# Altium PCB PCB2.PcbDoc
Units mm, origin at the board's own origin, x right, y up, seen from the top; angles counter-clockwise.
Board outline 100 x 100 mm, 6 copper layers (Top Layer, GND-A, VCC, GND-D, VEE, Bottom Layer), stack 1.231 mm thick; 147 components, 79 nets, 413 pads, 76 vias.
Unrouted connection lines stored in the file: 2.
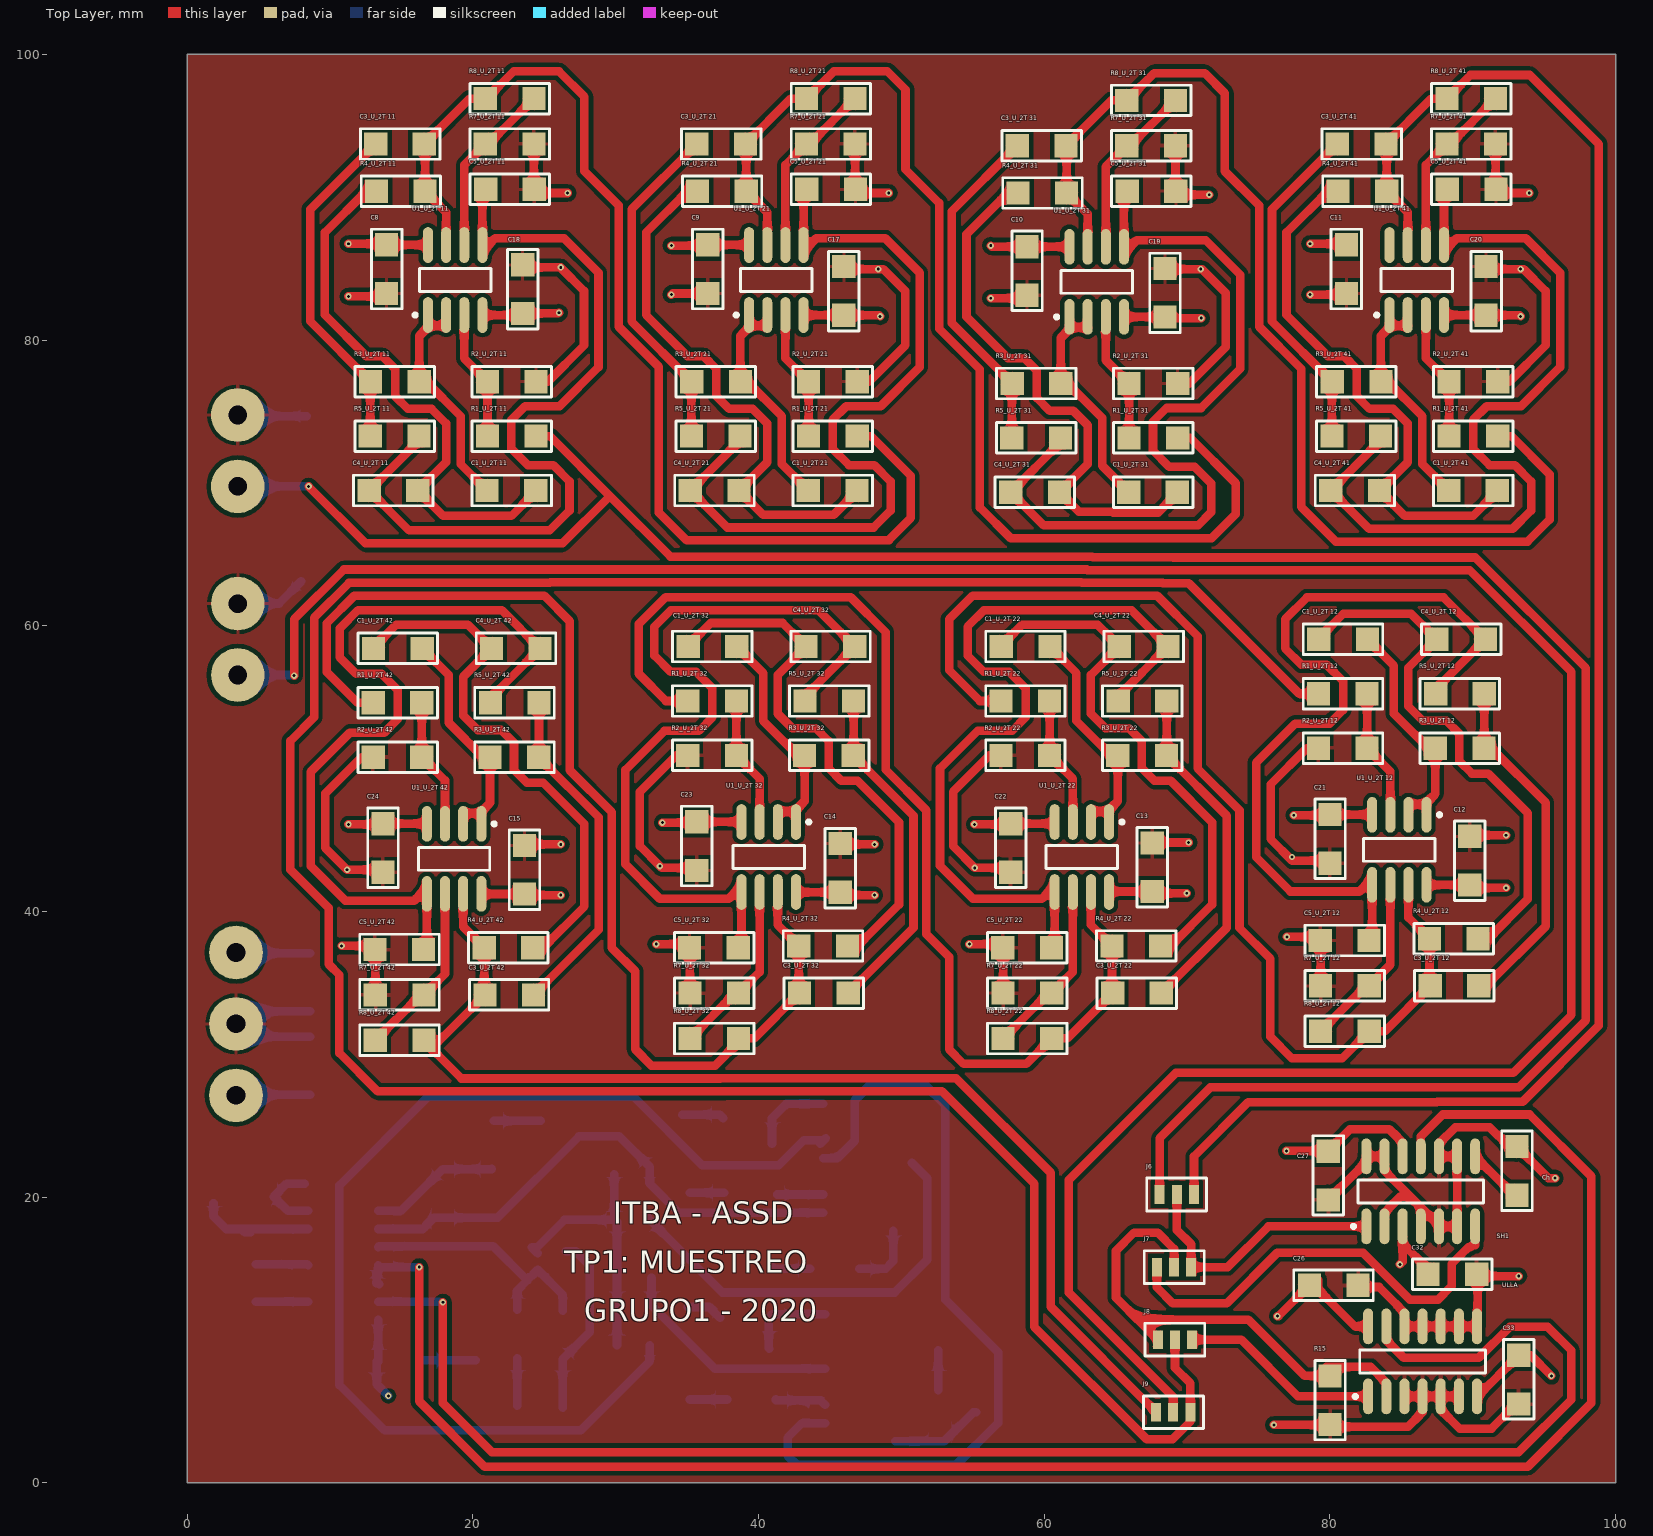
[diagram p0: Top Layer view]
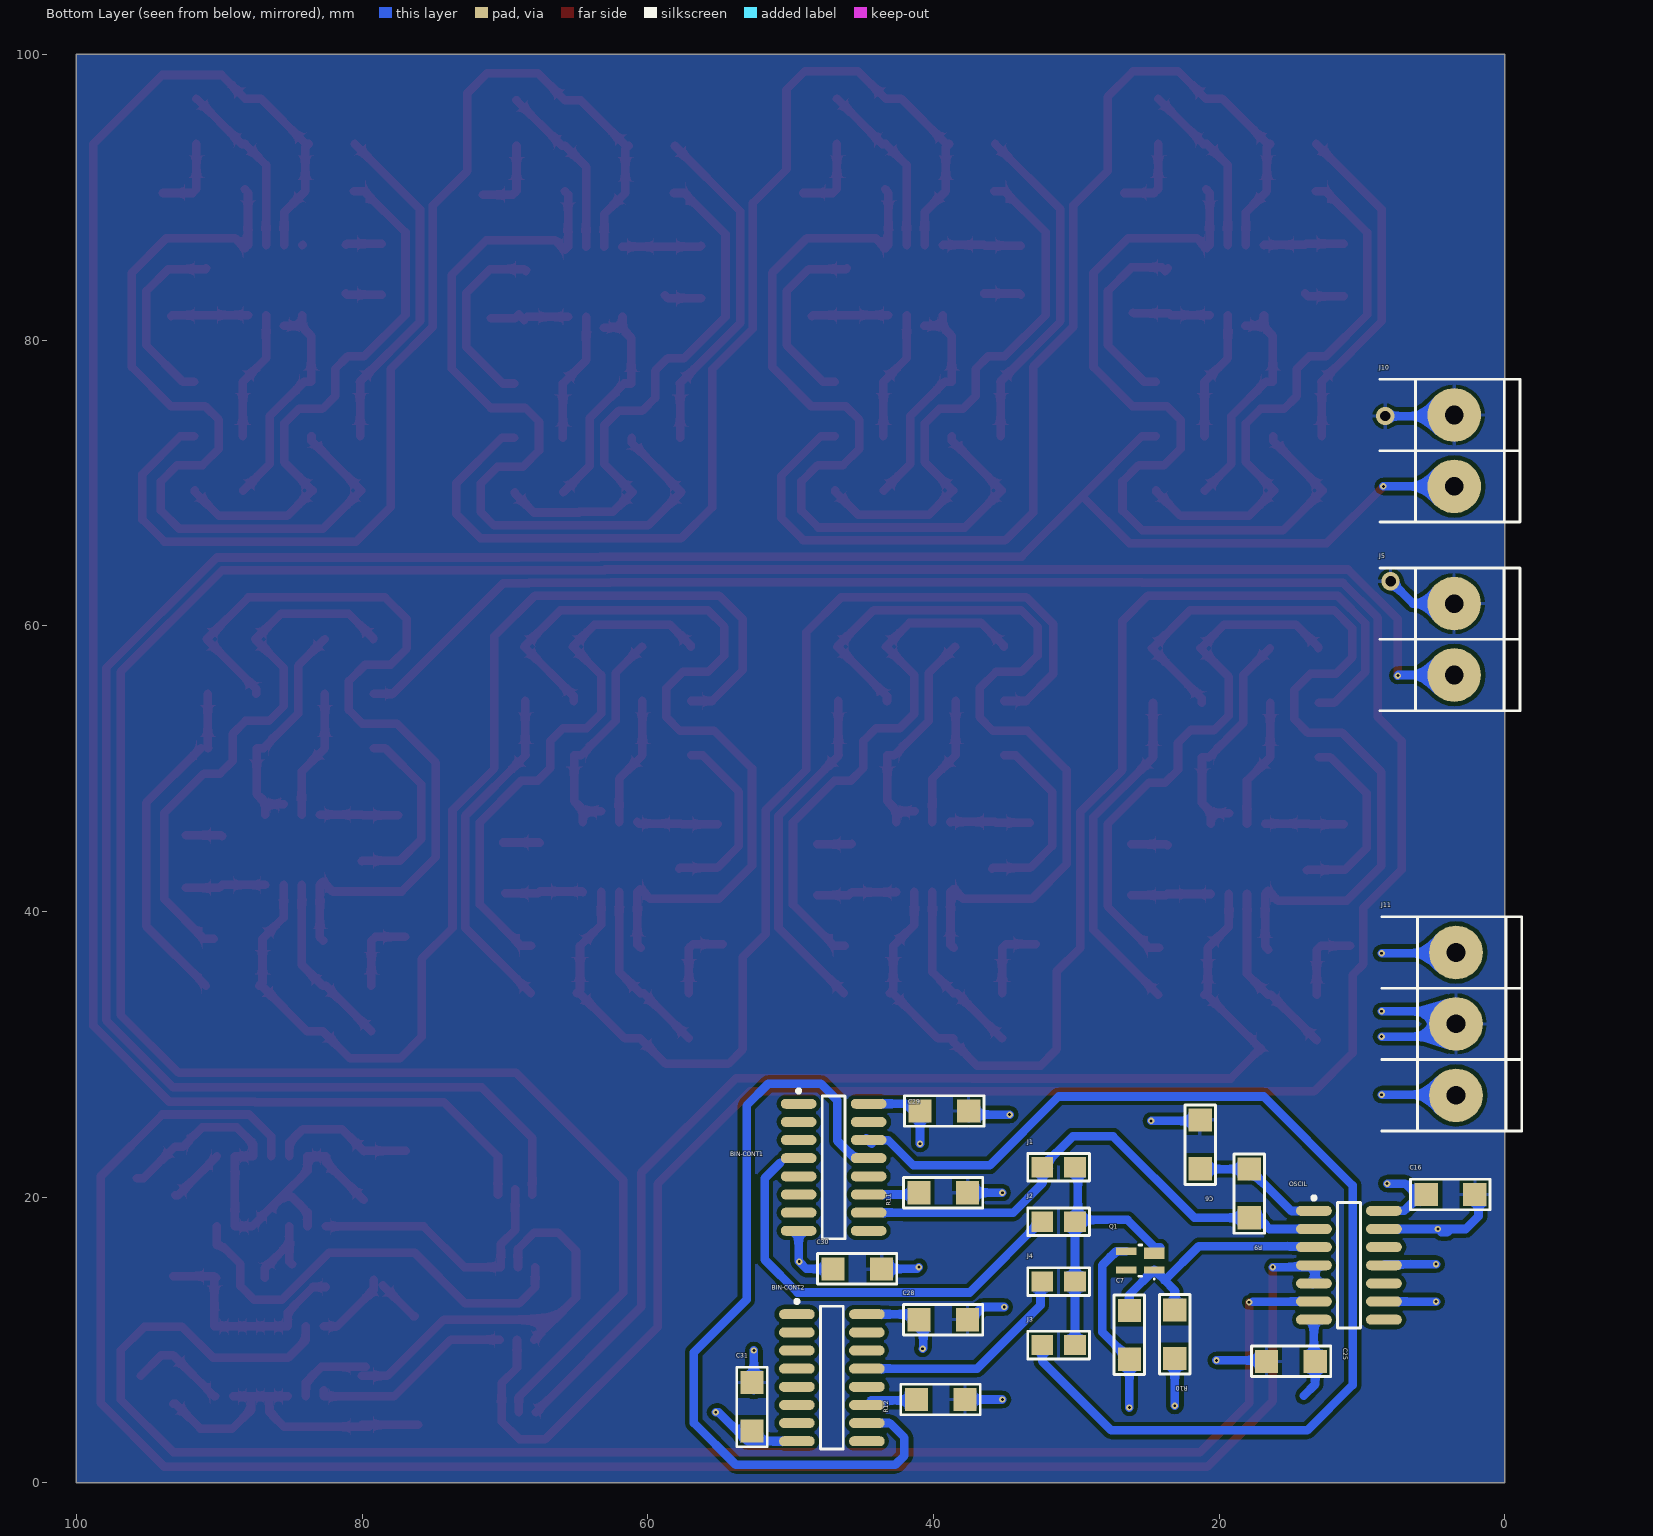
[diagram p1: Bottom Layer view, seen from below]
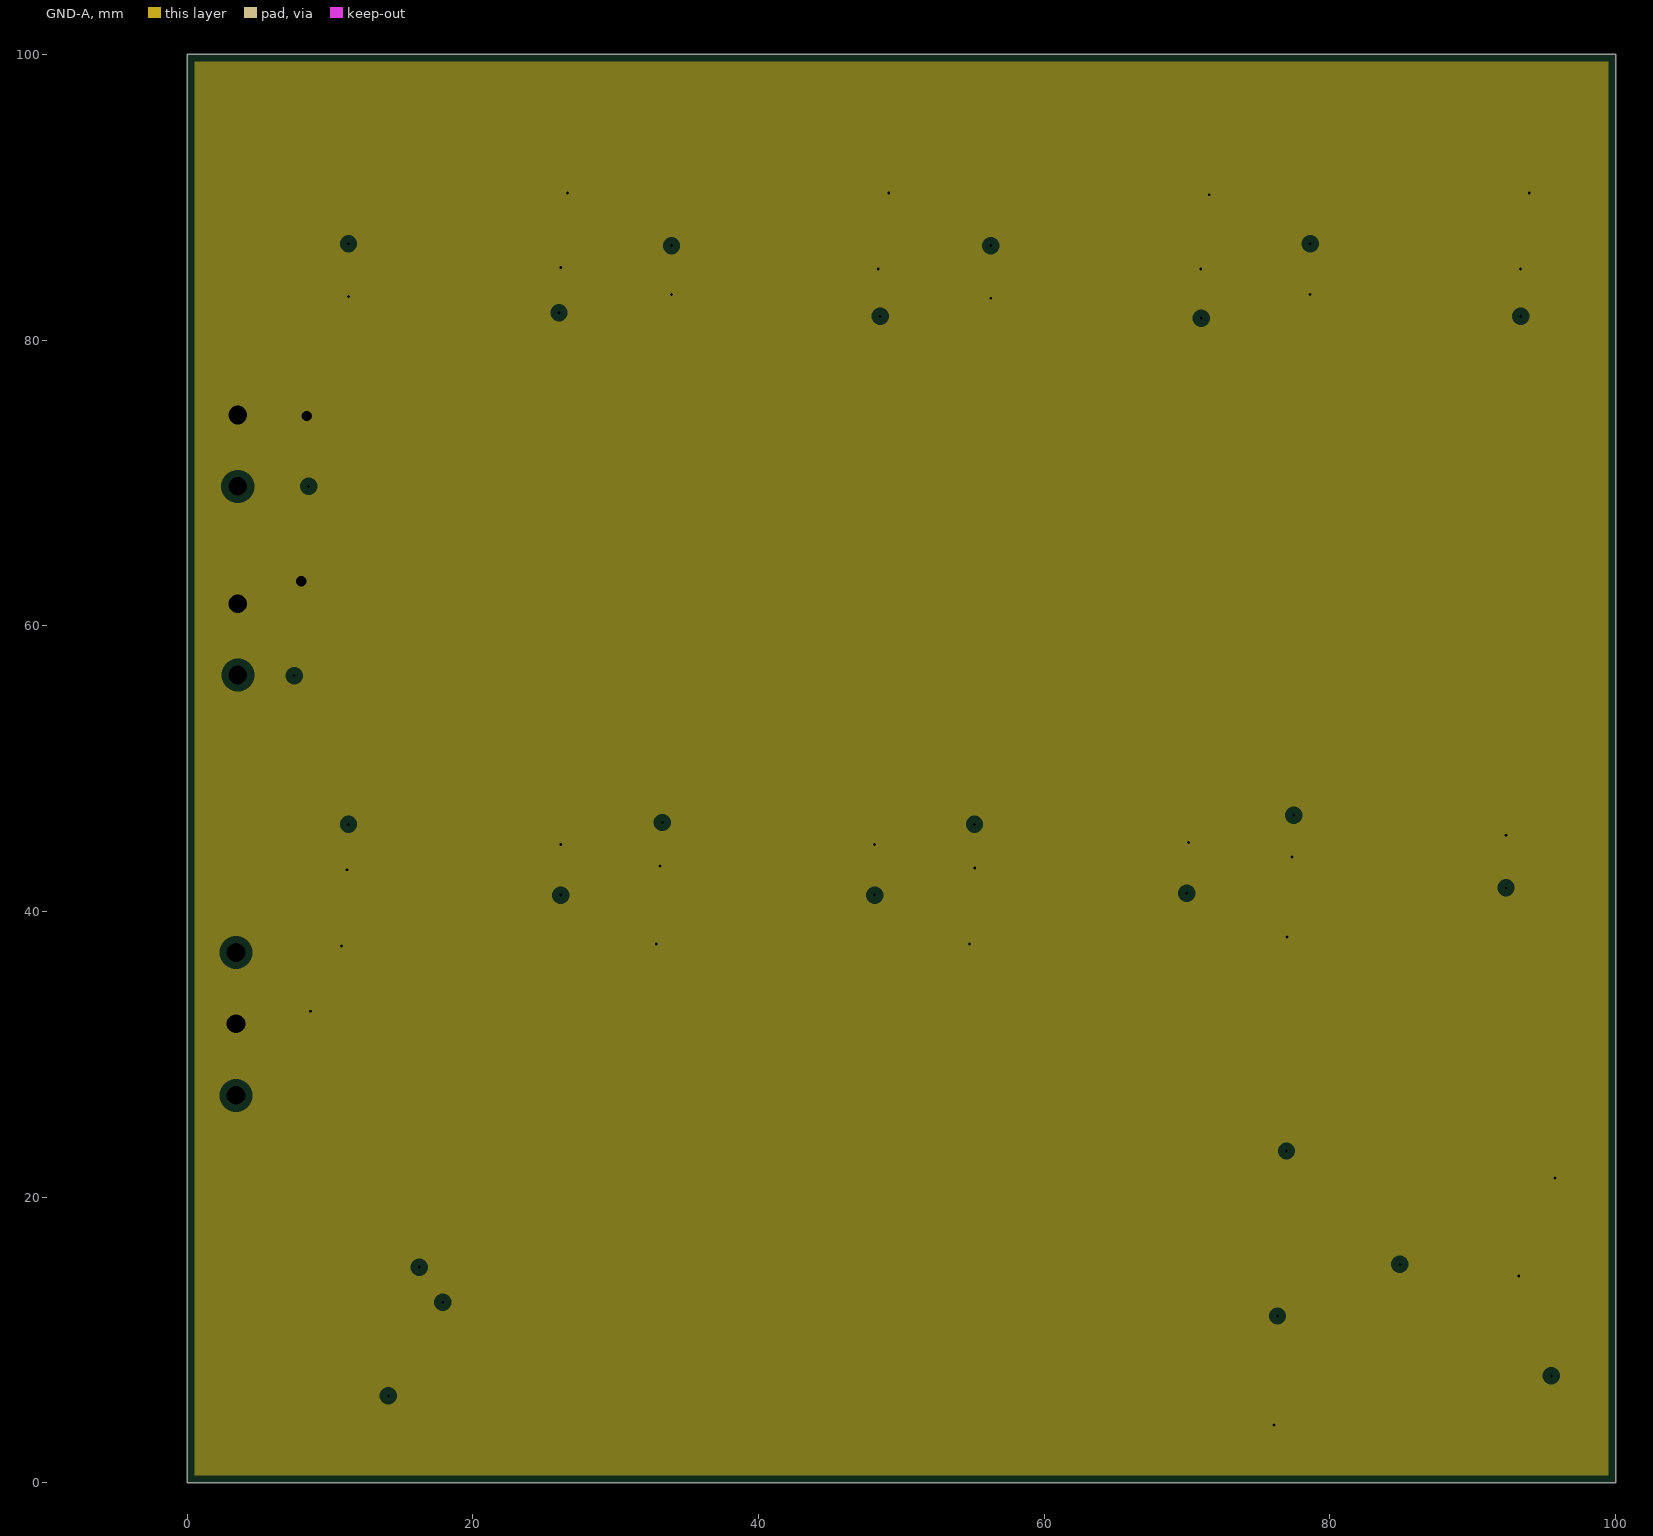
[diagram p2: GND-A, clearances drawn from the general rule]
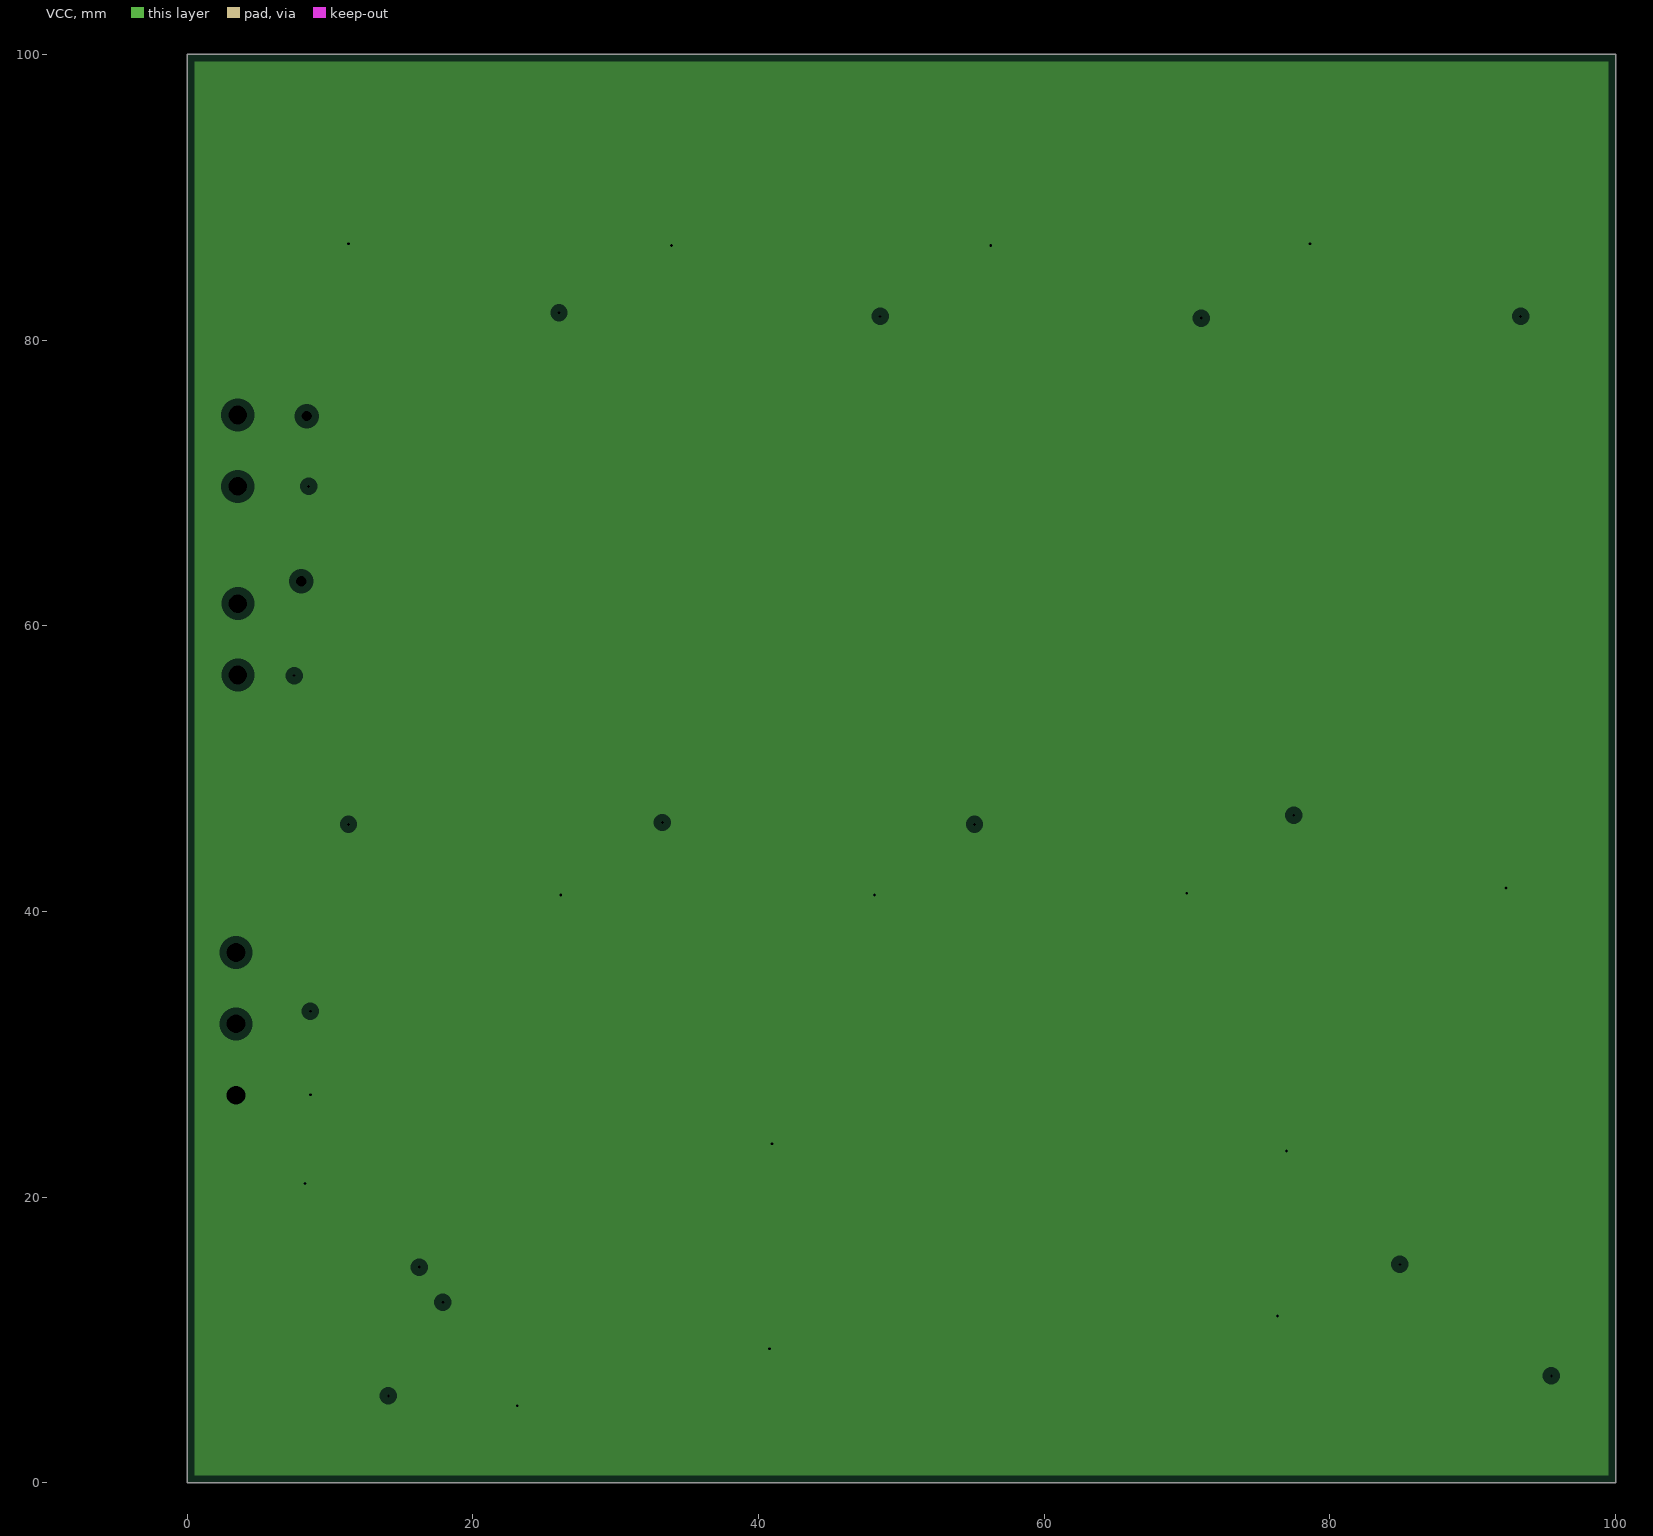
[diagram p3: VCC, clearances drawn from the general rule]
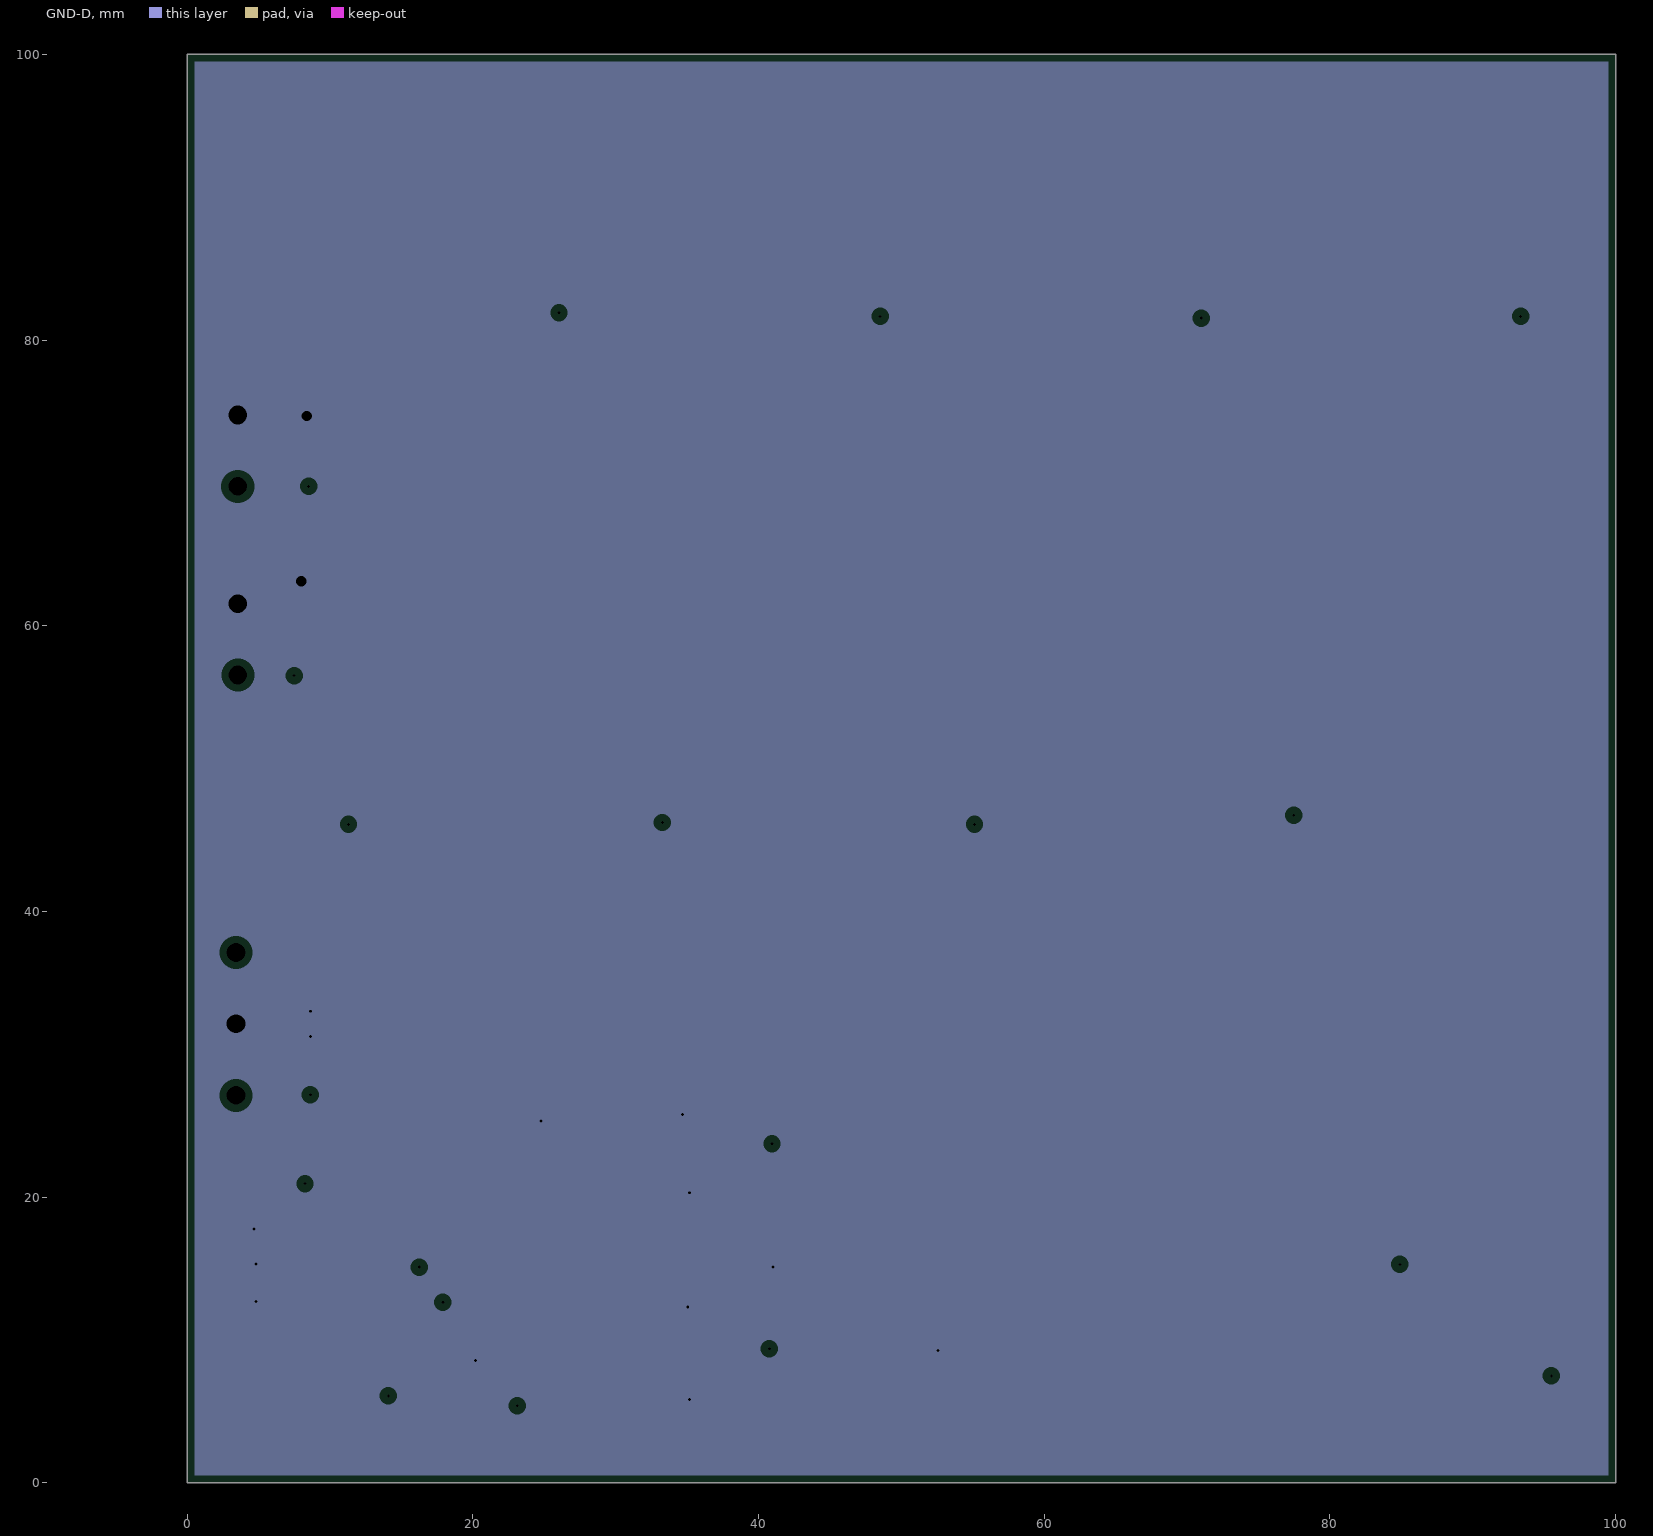
[diagram p4: GND-D, clearances drawn from the general rule]
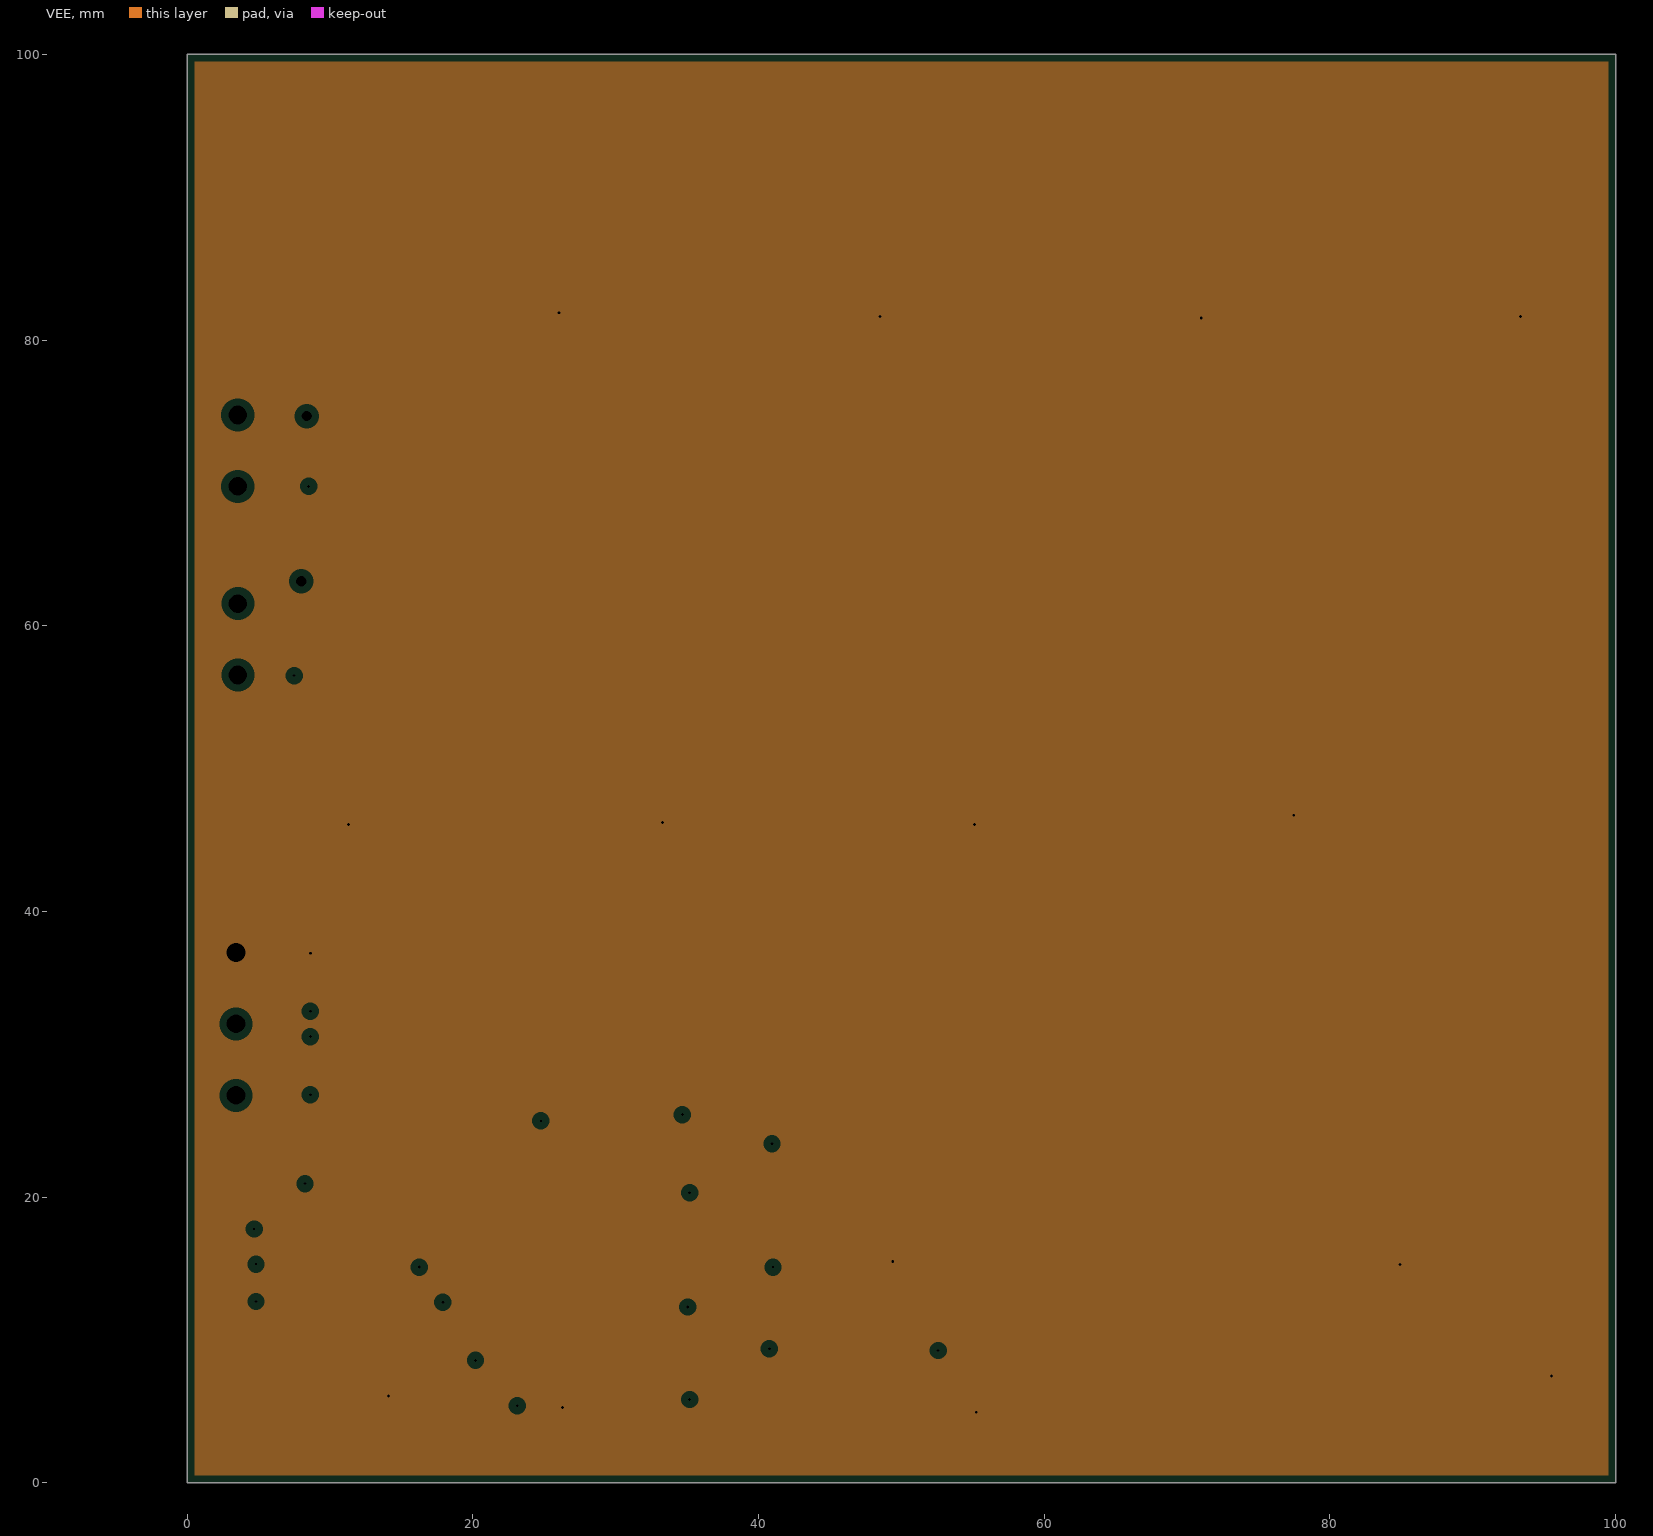
[diagram p5: VEE, clearances drawn from the general rule]
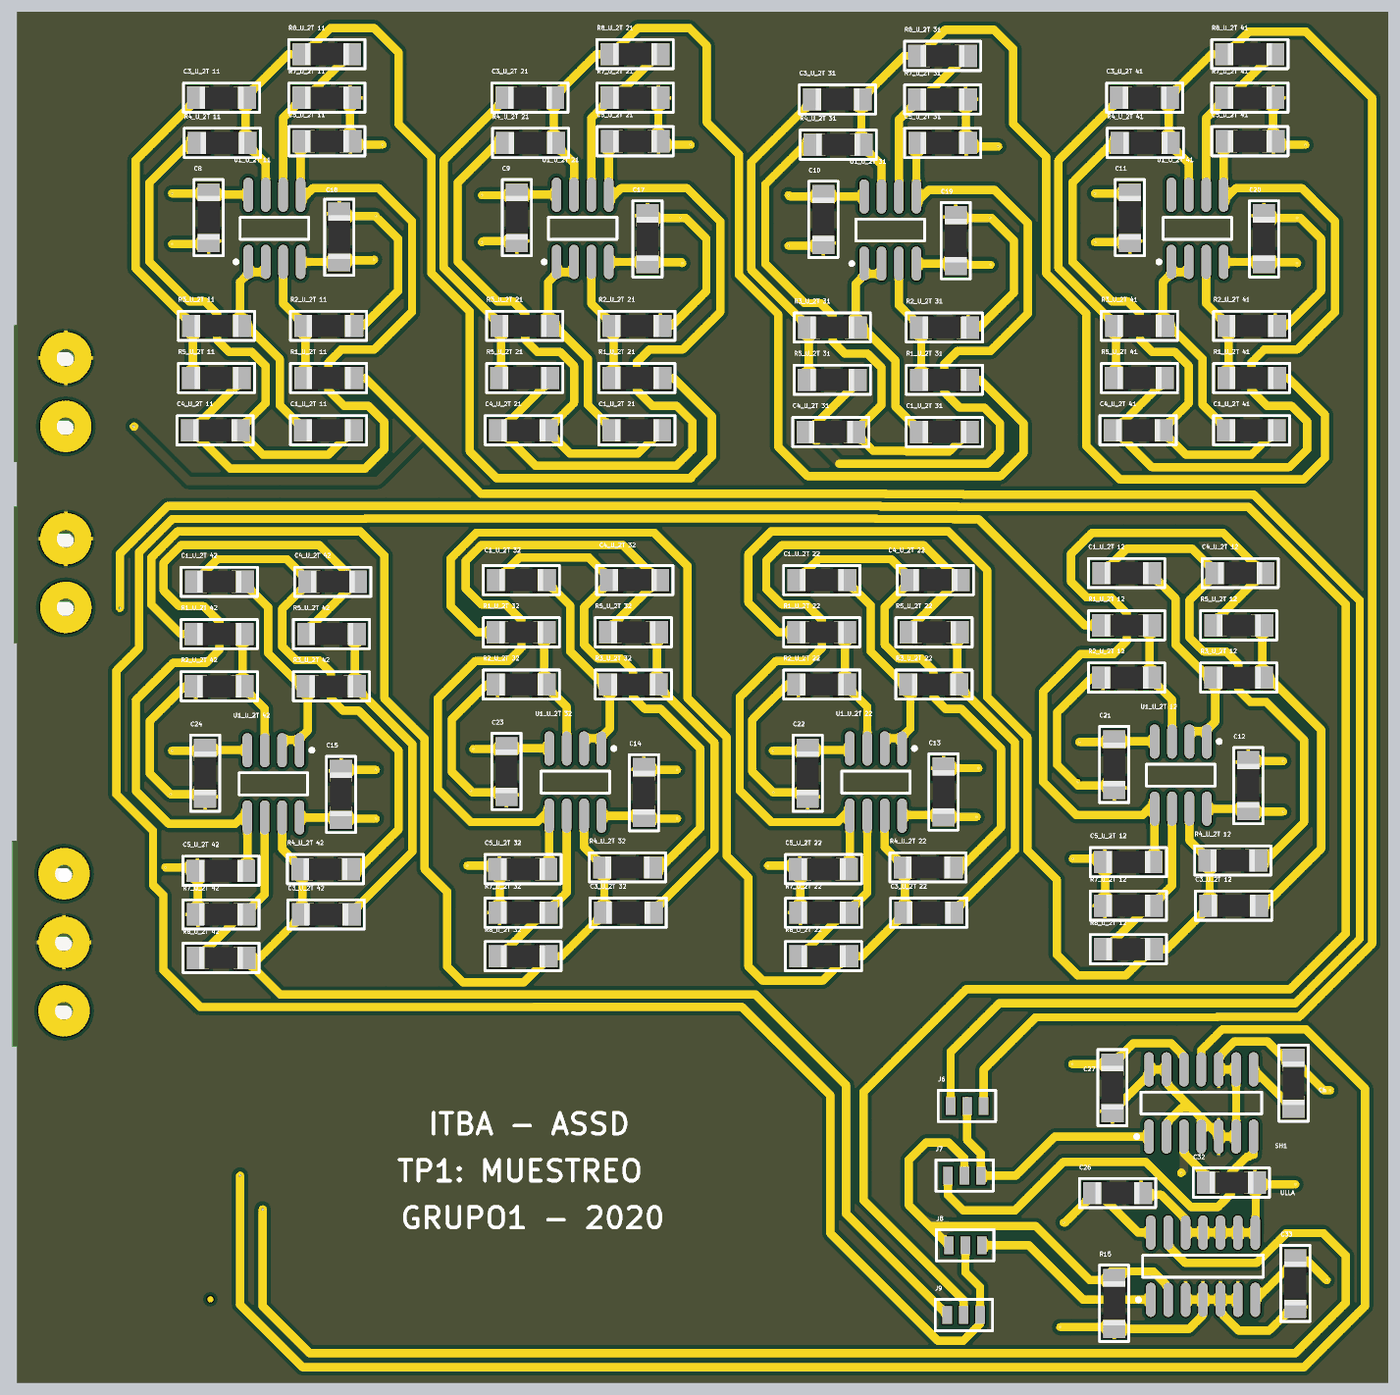
[diagram p6: 3D render of the assembled board from above, using the file's embedded part models]
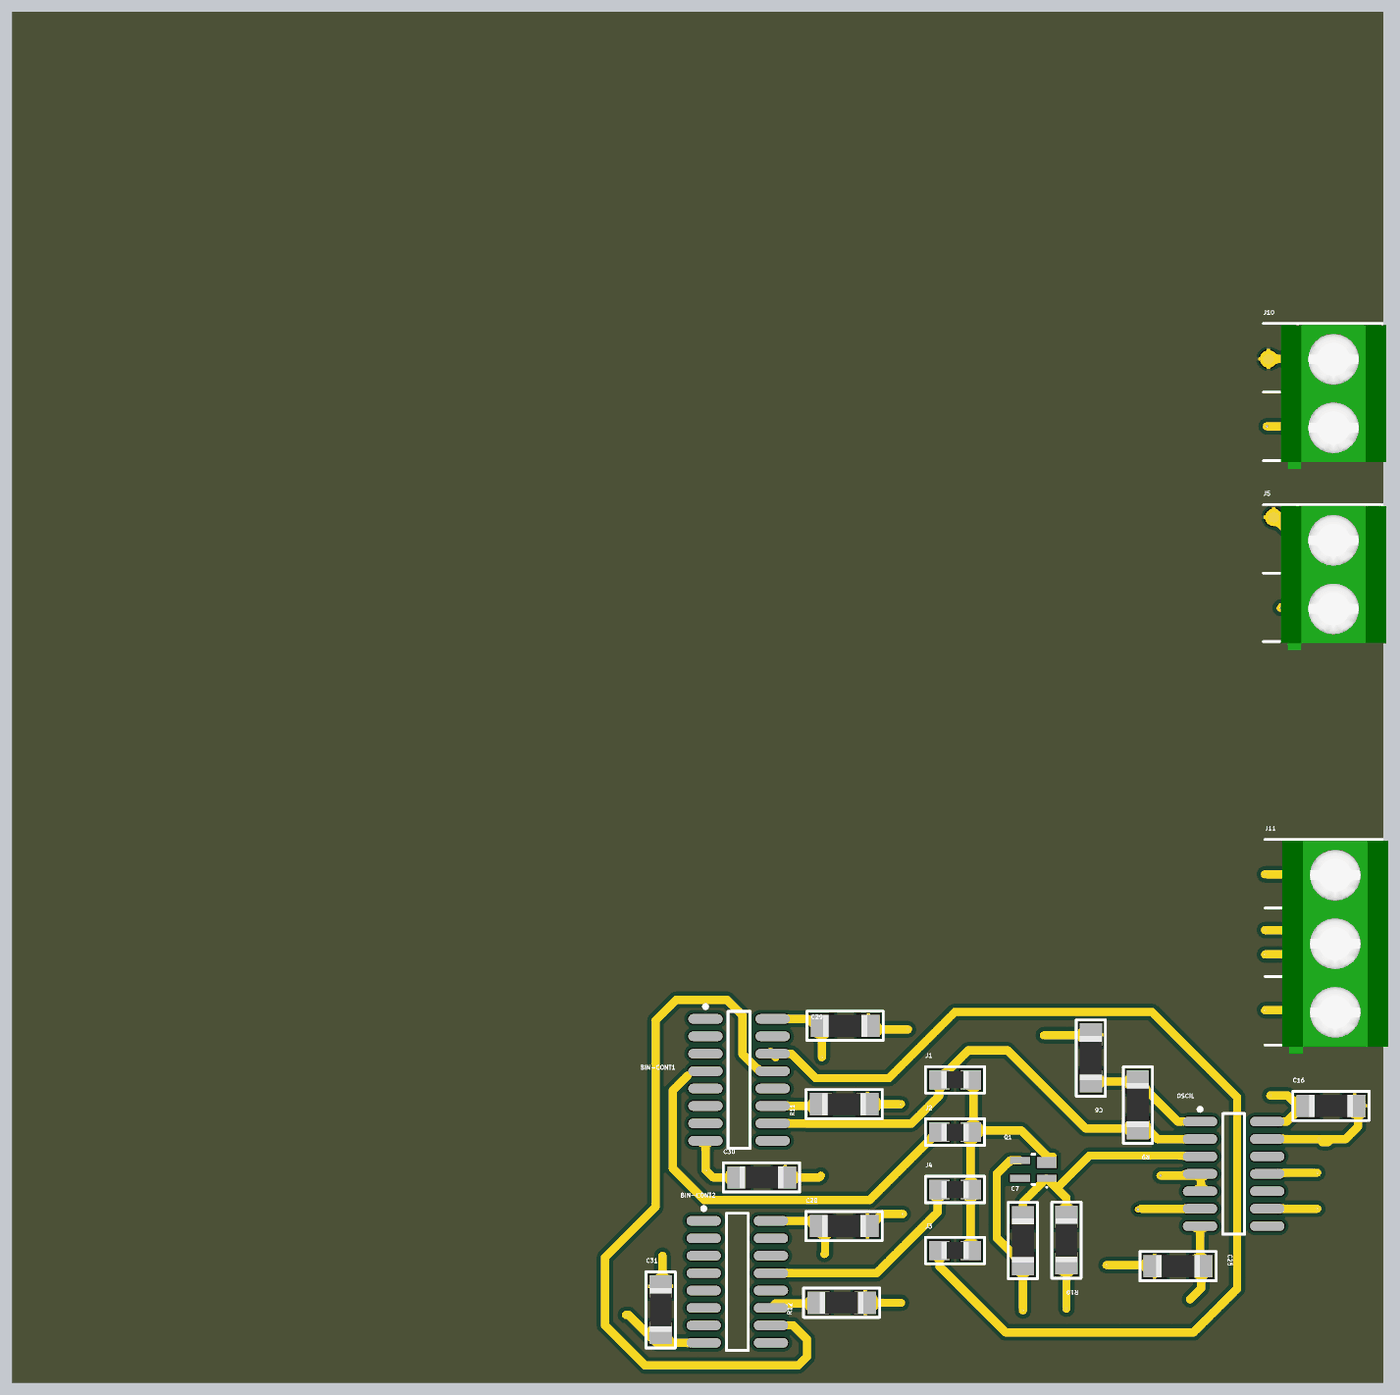
[diagram p7: 3D render of the assembled board from below, using the file's embedded part models]

## Layer stack, top to bottom
Top Solder: solder mask 0.0102, Solder Resist, Dk 3.5
Top Layer: signal copper 0.0356
Dielectric 1: core 0.254, FR-4, Dk 4.2
GND-A: plane copper 0.036, net GND
Dielectric 5: prepreg 0.127, Dk 4.2
VCC: plane copper 0.036, net VCC
Dielectric 6: core 0.254, Dk 4.2
GND-D: plane copper 0.036, net GND
Dielectric 3: prepreg 0.127, Dk 4.2
VEE: plane copper 0.036, net VEE
Dielectric 4: core 0.254, Dk 4.2
Bottom Layer: signal copper 0.0356
Bottom Solder: solder mask 0.0102, Solder Resist, Dk 3.5

## Board outline
0,0 0,100 100,100 100,0

## Design rules (kind name [scope] priority, off if disabled: settings)
Clearance [All] p1: gap=0.3 ignorepadtopadclearanceinfootprint=FALSE
PlaneClearance [All] p1: clearance=0.508
PlaneConnect [All] p1: pad.planeconnectstyle=Relief pad.reliefexpansion=0.508 pad.reliefentries=4 pad.reliefconductorwidth=0.254 pad.reliefairgap=0.254 via.planeconnectstyle=Direct via.reliefexpansion=0.508 via.reliefentries=4 via.reliefconductorwidth=0.254 via.reliefairgap=0.254
PolygonConnect [All] p1: connectstyle=Relief reliefconductorwidth=0.254 reliefentries=4 polygonreliefangle="90 Angle" airgapwidth=0.254
RoutingCorners [All] p1: cornerstyle=Round minsetback=2.54 maxsetback=2.54
RoutingVias MicroVias [((StartLayer = 'Top Layer') and (StopLayer = 'GND-A')) or   ((StartLayer = 'VEE') and (StopLayer = 'Bottom Layer'))] p1: holewidth=0.1 width=0.25 viastyle="Through Hole" minholewidth=0.1 minwidth=0.25 maxholewidth=0.1 maxwidth=0.25
RoutingVias Buried [((StartLayer = 'Top Layer') and (StopLayer = 'VCC')) or ((StartLayer = 'Top Layer') and (StopLayer = 'VEE')) or ((StartLayer = 'GND-A') and (StopLayer = 'Bottom Layer')) or ((StartLayer = 'VCC') and (StopLayer = 'Bottom Layer')) or ((StartLayer = 'GND-D') and (StopLayer = 'Bottom Layer'))] p2: holewidth=0.2 width=0.45 viastyle="Through Hole" minholewidth=0.2 minwidth=0.45 maxholewidth=0.2 maxwidth=0.45
RoutingVias ThroughHole [InDrillLayerPair('Top Layer - Bottom Layer')] p3: holewidth=0.2 width=0.45 viastyle="Through Hole" minholewidth=0.2 minwidth=0.45 maxholewidth=0.2 maxwidth=0.45
SolderMaskExpansion [All] p1: expansion=0.102
Width [All] p1: maxlimit=0.9 minlimit=0.6 preferedwidth=0.6
27 further rules are at their usual default settings.

## Classes and differential pairs
channel class FAA: U_FAA U_FAA2
channel class 2T: "U_2T 11" "U_2T 12" "U_2T 21" "U_2T 22" "U_2T 31" "U_2T 32" "U_2T 41" "U_2T 42"
component class U_SH: Ch SH1
component class U_SC: BIN-CONT1 BIN-CONT2 C6 C7 J1 J2 J3 J4 OSCIL Q1 R9 R10 R11 R12
component class U_LLA: R15 ULLA
component class "U_2T 42": "C1_U_2T 42" "C3_U_2T 42" "C4_U_2T 42" "C5_U_2T 42" "R1_U_2T 42" "R2_U_2T 42" "R3_U_2T 42" "R4_U_2T 42" "R5_U_2T 42" "R7_U_2T 42" "R8_U_2T 42" "U1_U_2T 42"
component class "U_2T 41": "C1_U_2T 41" "C3_U_2T 41" "C4_U_2T 41" "C5_U_2T 41" "R1_U_2T 41" "R2_U_2T 41" "R3_U_2T 41" "R4_U_2T 41" "R5_U_2T 41" "R7_U_2T 41" "R8_U_2T 41" "U1_U_2T 41"
component class "U_2T 32": "C1_U_2T 32" "C3_U_2T 32" "C4_U_2T 32" "C5_U_2T 32" "R1_U_2T 32" "R2_U_2T 32" "R3_U_2T 32" "R4_U_2T 32" "R5_U_2T 32" "R7_U_2T 32" "R8_U_2T 32" "U1_U_2T 32"
component class "U_2T 31": "C1_U_2T 31" "C3_U_2T 31" "C4_U_2T 31" "C5_U_2T 31" "R1_U_2T 31" "R2_U_2T 31" "R3_U_2T 31" "R4_U_2T 31" "R5_U_2T 31" "R7_U_2T 31" "R8_U_2T 31" "U1_U_2T 31"
component class "U_2T 22": "C1_U_2T 22" "C3_U_2T 22" "C4_U_2T 22" "C5_U_2T 22" "R1_U_2T 22" "R2_U_2T 22" "R3_U_2T 22" "R4_U_2T 22" "R5_U_2T 22" "R7_U_2T 22" "R8_U_2T 22" "U1_U_2T 22"
component class "U_2T 21": "C1_U_2T 21" "C3_U_2T 21" "C4_U_2T 21" "C5_U_2T 21" "R1_U_2T 21" "R2_U_2T 21" "R3_U_2T 21" "R4_U_2T 21" "R5_U_2T 21" "R7_U_2T 21" "R8_U_2T 21" "U1_U_2T 21"
component class "U_2T 12": "C1_U_2T 12" "C3_U_2T 12" "C4_U_2T 12" "C5_U_2T 12" "R1_U_2T 12" "R2_U_2T 12" "R3_U_2T 12" "R4_U_2T 12" "R5_U_2T 12" "R7_U_2T 12" "R8_U_2T 12" "U1_U_2T 12"
component class "U_2T 11": "C1_U_2T 11" "C3_U_2T 11" "C4_U_2T 11" "C5_U_2T 11" "R1_U_2T 11" "R2_U_2T 11" "R3_U_2T 11" "R4_U_2T 11" "R5_U_2T 11" "R7_U_2T 11" "R8_U_2T 11" "U1_U_2T 11"
component class FULL_CIRCUIT: C8 C9 C10 C11 C12 C13 C14 C15 C16 C17 C18 C19 C20 C21 C22 C23 C24 C25 C26 C27 C28 C29 C30 C31 C32 C33 J5 J6 J7 J8 J9 J10 J11

## Components (designator, comment, footprint, x,y, rotation, side; value= is the part's Value field where it differs from the comment)
BIN-CONT1 "IC_DIP16" D016_M 46.99,22.098 r180 bottom
BIN-CONT2 "IC_DIP16" D016_M 47.117,7.366 r180 bottom
"C1_U_2T 11" "CAP" 1206 22.708,69.469 r0 top (schematic designator C1)
"C1_U_2T 12" "CAP" 1206 80.924,59.055 r180 top (schematic designator C1)
"C1_U_2T 21" "CAP" 1206 45.187,69.469 r0 top (schematic designator C1)
"C1_U_2T 22" "CAP" 1206 58.699,58.547 r180 top (schematic designator C1)
"C1_U_2T 31" "CAP" 1206 67.615,69.342 r0 top (schematic designator C1)
"C1_U_2T 32" "CAP" 1206 36.779,58.547 r180 top (schematic designator C1)
"C1_U_2T 41" "CAP" 1206 90.018,69.469 r0 top (schematic designator C1)
"C1_U_2T 42" "CAP" 1206 14.757,58.42 r180 top (schematic designator C1)
"C3_U_2T 11" "CAP" 1206 14.91,93.726 r0 top (schematic designator C3)
"C3_U_2T 12" "CAP" 1206 88.722,34.798 r180 top (schematic designator C3)
"C3_U_2T 21" "CAP" 1206 37.389,93.726 r0 top (schematic designator C3)
"C3_U_2T 22" "CAP" 1206 66.497,34.29 r180 top (schematic designator C3)
"C3_U_2T 31" "CAP" 1206 59.817,93.599 r0 top (schematic designator C3)
"C3_U_2T 32" "CAP" 1206 44.577,34.29 r180 top (schematic designator C3)
"C3_U_2T 41" "CAP" 1206 82.22,93.726 r0 top (schematic designator C3)
"C3_U_2T 42" "CAP" 1206 22.555,34.163 r180 top (schematic designator C3)
"C4_U_2T 11" "CAP" 1206 14.453,69.469 r180 top (schematic designator C4)
"C4_U_2T 12" "CAP" 1206 89.179,59.055 r0 top (schematic designator C4)
"C4_U_2T 21" "CAP" 1206 36.932,69.469 r180 top (schematic designator C4)
"C4_U_2T 22" "CAP" 1206 66.954,58.547 r0 top (schematic designator C4)
"C4_U_2T 31" "CAP" 1206 59.36,69.342 r180 top (schematic designator C4)
"C4_U_2T 32" "CAP" 1206 45.034,58.547 r0 top (schematic designator C4)
"C4_U_2T 41" "CAP" 1206 81.763,69.469 r180 top (schematic designator C4)
"C4_U_2T 42" "CAP" 1206 23.012,58.42 r0 top (schematic designator C4)
"C5_U_2T 11" "CAP" 1206 22.606,90.551 r180 top (schematic designator C5)
"C5_U_2T 12" "CAP" 1206 81.026,37.973 r0 top (schematic designator C5)
"C5_U_2T 21" "CAP" 1206 45.085,90.551 r180 top (schematic designator C5)
"C5_U_2T 22" "CAP" 1206 58.801,37.465 r0 top (schematic designator C5)
"C5_U_2T 31" "CAP" 1206 67.513,90.424 r180 top (schematic designator C5)
"C5_U_2T 32" "CAP" 1206 36.881,37.465 r0 top (schematic designator C5)
"C5_U_2T 41" "CAP" 1206 89.916,90.551 r180 top (schematic designator C5)
"C5_U_2T 42" "CAP" 1206 14.859,37.338 r0 top (schematic designator C5)
C6 "CAP" 1206 21.336,23.698 r270 bottom
C7 "CAP" 1206 26.289,10.363 r90 bottom
C8 "CAP" 1206 13.97,84.963 r90 top
C9 "CAP" 1206 36.449,84.963 r90 top
C10 "CAP" 1206 58.801,84.836 r90 top
C11 "CAP" 1206 81.153,84.963 r90 top
C12 "CAP" 1206 89.789,43.561 r270 top
C13 "CAP" 1206 67.564,43.104 r270 top
C14 "CAP" 1206 45.72,43.053 r270 top
C15 "CAP" 1206 23.622,42.926 r270 top
C16 "CAP" 1206 3.81,20.193 r0 bottom
C17 "CAP" 1206 45.974,83.439 r270 top
C18 "CAP" 1206 23.495,83.566 r270 top
C19 "CAP" 1206 68.453,83.312 r270 top
C20 "CAP" 1206 90.932,83.439 r270 top
C21 "CAP" 1206 80.01,45.085 r90 top
C22 "CAP" 1206 57.658,44.45 r90 top
C23 "CAP" 1206 35.687,44.577 r90 top
C24 "CAP" 1206 13.716,44.45 r90 top
C25 "CAP" 1206 14.986,8.509 r180 bottom
C26 "CAP" 1206 80.264,13.843 r180 top
C27 "CAP" 1206 79.883,21.514 r90 top
C28 "CAP" 1206 39.319,11.43 r0 bottom
C29 "CAP" 1206 39.243,26.035 r0 bottom
C30 "CAP" 1206 45.339,14.986 r0 bottom
C31 "CAP" 1206 52.705,5.334 r270 bottom
C32 "CAP" 1206 88.57,14.605 r180 top
C33 "CAP" 1206 93.218,7.239 r90 top
Ch "CAP" 1206 93.091,21.844 r90 top
J1 "JUMPER" 0805 31.242,22.098 r180 bottom
J2 "JUMPER" 0805 31.242,18.288 r0 bottom
J3 "JUMPER" 0805 31.242,9.652 r0 bottom
J4 "JUMPER" 0805 31.242,14.097 r0 bottom
J5 "BORNERA 2" BORNERA2 3.556,59.055 r0 bottom
J6 "JUMPER" "myJumper - duplicate" 70.485,20.193 r270 top
J7 "JUMPER" "myJumper - duplicate" 67.888,15.113 r90 top
J8 "JUMPER" "myJumper - duplicate" 70.358,10.033 r270 top
J9 "JUMPER" "myJumper - duplicate" 67.831,4.953 r90 top
J10 "BORNERA 2" BORNERA2 3.552,72.256 r0 bottom
J11 "BORNERA 3" BORNERA3 3.429,32.131 r0 bottom
OSCIL "IC_DIP14" D014_M 10.922,15.24 r180 bottom
Q1 "MOSFET-N" SOT-343_M 25.527,15.57 r0 bottom
"R1_U_2T 11" "RES" 1206 22.733,73.279 r180 top (schematic designator R1)
"R1_U_2T 12" "RES" 1206 80.899,55.245 r0 top (schematic designator R1)
"R1_U_2T 21" "RES" 1206 45.212,73.279 r180 top (schematic designator R1)
"R1_U_2T 22" "RES" 1206 58.674,54.737 r0 top (schematic designator R1)
"R1_U_2T 31" "RES" 1206 67.64,73.152 r180 top (schematic designator R1)
"R1_U_2T 32" "RES" 1206 36.754,54.737 r0 top (schematic designator R1)
"R1_U_2T 41" "RES" 1206 90.043,73.279 r180 top (schematic designator R1)
"R1_U_2T 42" "RES" 1206 14.732,54.61 r0 top (schematic designator R1)
"R2_U_2T 11" "RES" 1206 22.733,77.089 r180 top (schematic designator R2)
"R2_U_2T 12" "RES" 1206 80.899,51.435 r0 top (schematic designator R2)
"R2_U_2T 21" "RES" 1206 45.212,77.089 r180 top (schematic designator R2)
"R2_U_2T 22" "RES" 1206 58.674,50.927 r0 top (schematic designator R2)
"R2_U_2T 31" "RES" 1206 67.64,76.962 r180 top (schematic designator R2)
"R2_U_2T 32" "RES" 1206 36.754,50.927 r0 top (schematic designator R2)
"R2_U_2T 41" "RES" 1206 90.043,77.089 r180 top (schematic designator R2)
"R2_U_2T 42" "RES" 1206 14.732,50.8 r0 top (schematic designator R2)
"R3_U_2T 11" "RES" 1206 14.554,77.089 r180 top (schematic designator R3)
"R3_U_2T 12" "RES" 1206 89.078,51.435 r0 top (schematic designator R3)
"R3_U_2T 21" "RES" 1206 37.033,77.089 r180 top (schematic designator R3)
"R3_U_2T 22" "RES" 1206 66.853,50.927 r0 top (schematic designator R3)
"R3_U_2T 31" "RES" 1206 59.461,76.962 r180 top (schematic designator R3)
"R3_U_2T 32" "RES" 1206 44.933,50.927 r0 top (schematic designator R3)
"R3_U_2T 41" "RES" 1206 81.864,77.089 r180 top (schematic designator R3)
"R3_U_2T 42" "RES" 1206 22.911,50.8 r0 top (schematic designator R3)
"R4_U_2T 11" "RES" 1206 14.961,90.424 r0 top (schematic designator R4)
"R4_U_2T 12" "RES" 1206 88.671,38.1 r180 top (schematic designator R4)
"R4_U_2T 21" "RES" 1206 37.44,90.424 r0 top (schematic designator R4)
"R4_U_2T 22" "RES" 1206 66.446,37.592 r180 top (schematic designator R4)
"R4_U_2T 31" "RES" 1206 59.868,90.297 r0 top (schematic designator R4)
"R4_U_2T 32" "RES" 1206 44.526,37.592 r180 top (schematic designator R4)
"R4_U_2T 41" "RES" 1206 82.271,90.424 r0 top (schematic designator R4)
"R4_U_2T 42" "RES" 1206 22.504,37.465 r180 top (schematic designator R4)
"R5_U_2T 11" "RES" 1206 14.529,73.279 r0 top (schematic designator R5)
"R5_U_2T 12" "RES" 1206 89.103,55.245 r180 top (schematic designator R5)
"R5_U_2T 21" "RES" 1206 37.008,73.279 r0 top (schematic designator R5)
"R5_U_2T 22" "RES" 1206 66.878,54.737 r180 top (schematic designator R5)
"R5_U_2T 31" "RES" 1206 59.436,73.152 r0 top (schematic designator R5)
"R5_U_2T 32" "RES" 1206 44.958,54.737 r180 top (schematic designator R5)
"R5_U_2T 41" "RES" 1206 81.839,73.279 r0 top (schematic designator R5)
"R5_U_2T 42" "RES" 1206 22.936,54.61 r180 top (schematic designator R5)
"R7_U_2T 11" "RES" 1206 22.581,93.726 r0 top (schematic designator R7)
"R7_U_2T 12" "RES" 1206 81.051,34.798 r180 top (schematic designator R7)
"R7_U_2T 21" "RES" 1206 45.06,93.726 r0 top (schematic designator R7)
"R7_U_2T 22" "RES" 1206 58.826,34.29 r180 top (schematic designator R7)
"R7_U_2T 31" "RES" 1206 67.488,93.599 r0 top (schematic designator R7)
"R7_U_2T 32" "RES" 1206 36.906,34.29 r180 top (schematic designator R7)
"R7_U_2T 41" "RES" 1206 89.891,93.726 r0 top (schematic designator R7)
"R7_U_2T 42" "RES" 1206 14.884,34.163 r180 top (schematic designator R7)
"R8_U_2T 11" "RES" 1206 22.581,96.901 r0 top (schematic designator R8)
"R8_U_2T 12" "RES" 1206 81.051,31.623 r180 top (schematic designator R8)
"R8_U_2T 21" "RES" 1206 45.06,96.901 r0 top (schematic designator R8)
"R8_U_2T 22" "RES" 1206 58.826,31.115 r180 top (schematic designator R8)
"R8_U_2T 31" "RES" 1206 67.488,96.774 r0 top (schematic designator R8)
"R8_U_2T 32" "RES" 1206 36.906,31.115 r180 top (schematic designator R8)
"R8_U_2T 41" "RES" 1206 89.891,96.901 r0 top (schematic designator R8)
"R8_U_2T 42" "RES" 1206 14.884,30.988 r180 top (schematic designator R8)
R9 "RES" 1206 17.907,20.269 r270 bottom
R10 "RES" 1206 23.114,10.414 r270 bottom
R11 "RES" 1206 39.319,20.32 r0 bottom
R12 "RES" 1206 39.497,5.842 r0 bottom
R15 "RES" 1206 80.01,5.791 r90 top
SH1 "IC_DIP14" D014_M 86.36,20.41 r90 top
"U1_U_2T 11" "TL082CD" TI-D8_M 18.771,84.201 r90 top (schematic designator U1)
"U1_U_2T 12" "TL082CD" TI-D8_M 84.861,44.323 r270 top (schematic designator U1)
"U1_U_2T 21" "TL082CD" TI-D8_M 41.25,84.201 r90 top (schematic designator U1)
"U1_U_2T 22" "TL082CD" TI-D8_M 62.636,43.815 r270 top (schematic designator U1)
"U1_U_2T 31" "TL082CD" TI-D8_M 63.678,84.074 r90 top (schematic designator U1)
"U1_U_2T 32" "TL082CD" TI-D8_M 40.716,43.815 r270 top (schematic designator U1)
"U1_U_2T 41" "TL082CD" TI-D8_M 86.081,84.201 r90 top (schematic designator U1)
"U1_U_2T 42" "TL082CD" TI-D8_M 18.694,43.688 r270 top (schematic designator U1)
ULLA "IC_DIP14" D014_M 86.487,8.509 r90 top

## Footprints (in the part's own frame and the unit in brackets; to place one, negate y for a bottom-side part, rotate by r counter-clockwise, add the part's x,y. Pads: shape width x height; smd on the part's side, far side on the other; paste and mask are expansions set on the pad)
0805 [mil] "Pasivo 0805"
  rect 60x56 smd: 1(-45,0) 2(45,0)
  silkscreen extent -85,-38 85,38, body extent -40,-25 39,25, height 15
1206 [mil] "Pasivo 1206"
  rect 64x64 smd: 1(-67,0) 2(67,0)
  silkscreen extent -109,-42 110,42, body extent -62,-32 63,31, height 20
BORNERA2 [mm] "Bornera con Tornillos 5mm separación"
  round 3.75 hole 1.3: 1(0,2.5) 2(0,-2.5)
  silkscreen extent -4.6,-5 5.2,5, body extent -3.76,-4.89 3.94,5.61, height 10
BORNERA3 [mm] "Bornera con Tornillos 5mm separación"
  round 3.75 hole 1.3: 1(0,5) 2(0,0) 3(0,-5)
  silkscreen extent -4.6,-7.5 5.2,7.5, body extent -3.76,-7.39 3.94,8.11, height 10.05
D014_M [mm] "SOIC, 14-Leads, Body 8.7x3.9mm, Pitch 1.27mm, IPC Low Density"
  oval 2.5x0.7 smd: 1(-2.45,3.81) 2(-2.45,2.54) 3(-2.45,1.27) 4(-2.45,0) 5(-2.45,-1.27) 6(-2.45,-2.54) 7(-2.45,-3.81) 8(2.45,-3.81) 9(2.45,-2.54) 10(2.45,-1.27) 11(2.45,0) 12(2.45,1.27) 13(2.45,2.54) 14(2.45,3.81)
  silkscreen extent -2.58,-4.4 0.8,4.83, body extent -2,-4.38 2,4.38, height 1.75
D016_M [mm] "16-Pin Small Outline Integrated Circuit 1.27 mm Pitch, IPC Low Density"
  oval 2.5x0.7 smd: 1(-2.45,4.445) 2(-2.45,3.175) 3(-2.45,1.905) 4(-2.45,0.635) 5(-2.45,-0.635) 6(-2.45,-1.905) 7(-2.45,-3.175) 8(-2.45,-4.445) 9(2.45,-4.445) 10(2.45,-3.175) 11(2.45,-1.905) 12(2.45,-0.635) 13(2.45,0.635) 14(2.45,1.905) 15(2.45,3.175) 16(2.45,4.445)
  silkscreen extent -2.58,-5 0.8,5.47, body extent -2,-5 2,5, height 1.75
"myJumper - duplicate" [mm]
  rect 1.3x0.7 smd: 1(0,0) 2(0,-1.2) 3(0,-2.4)
  silkscreen extent -1.14,-3.31 1.14,0.88
SOT-343_M [mm] "SOT343, 4-Leads, Body 2x1.3 mm, Pitch 1.3mm, Lead Span 2.1mm, IPC Low Density"
  rect 1.45x0.5 smd: 1(-0.975,0.65) 3(0.975,-0.65) 4(0.975,0.65)
  rect 1.45x0.8 smd: 2(-0.975,-0.5)
  silkscreen extent -1.02,-1.1 0.1,1.35, body extent -0.7,-1.1 0.7,1.1, height 1
TI-D8_M [mm] "SOIC, 8-Leads, Body 4.9x3.9mm, Pitch 1.27mm, IPC Low Density"
  oval 2.5x0.7 smd: 1(-2.45,1.905) 2(-2.45,0.635) 3(-2.45,-0.635) 4(-2.45,-1.905) 5(2.45,-1.905) 6(2.45,-0.635) 7(2.45,0.635) 8(2.45,1.905)
  silkscreen extent -2.57,-2.5 0.8,2.93, body extent -2,-2.5 2,2.5, height 1.75

## Part data
J6 J7 J8 J9: library part JUMPER3
Q1: "N-Channel MOSFET", LatestRevisionDate=17-Jul-2002, LatestRevisionNote="Re-released for DXP Platform.", PackageDescription="TO, Flat Index; 3 In-Line, Axial Leads; Body Dia. 4.6mm; Lead Dia. 0.5 mm (max)", PackageReference=E3, PackageVersion=1995/1996, Published=8-Jun-2000, Publisher="Altium Limited"
"U1_U_2T 11" "U1_U_2T 12" "U1_U_2T 21" "U1_U_2T 22" "U1_U_2T 31" "U1_U_2T 32" "U1_U_2T 41" "U1_U_2T 42": "JFET-Input Operational Amplifier, 7 to 36 V, 0 to 70 degC, 8-pin SOIC (D8), Green (RoHS & no Sb/Br)", Manufacturer="Texas Instruments", Rating=Catalog, Supplier Part Number 1=296-1284-5-ND, Total Supply Voltage(Max)(+5V is 5, +/-5V is 10)=36, Total Supply Voltage(Min)(+5V is 5, +/-5V is 10)=7, CMRR(Min)(dB)=70, Code_JEDEC=MS-012, ComponentLink1Description="Manufacturer URL", ComponentLink1URL=http://www.ti.com/, ComponentLink2Description=Datasheet, ComponentLink2URL=http://www.ti.com/lit/ds/symlink/tl082.pdf, ComponentLink3Description="Package Specification", ComponentLink3URL=http://www.ti.com/litv/pdf/msoi002j, DatasheetVersion=SLOS081G, Eco-Plan="Green (RoHS & no Sb/Br)", GBW(Typ)(MHz)=3, IIB(Max)(pA)=400, Iq per channel(Max)(mA)=2.8, Mounting Technology="Surface Mount", Number of Channels=2, Offset Drift(Typ)(uV/C)=18, PackageDescription="8-Pin Plastic Small Outline, Body 4.9 x 3.9 mm, Pitch 1.27 mm", PackageReference=D8, PackageVersion="4040047-3/M, 06/2011", PartNumber=TL082CD, Slew Rate(Typ)(V/us)=13, Sub Family="General Purpose Amplifier, High Supply Voltage Amplifier (>=30V)", Supplier 1=Digi-Key, Supplier 2=Farnell, Supplier 3=Newark, Supplier 4=Mouser, Supplier Part Number 2=1103183, Supplier Part Number 3=35K1261, Supplier Part Number 4=595-TL082CD, Vio (25C)(Max)(mV)=15, Vn at 1kHz(Typ)(nV/rtHz)=18

## Via types
v1: diameter 0.45, hole 0.2, Top Layer to GND-A, 27 vias
v2: diameter 0.45, hole 0.2, GND-D to Bottom Layer, 12 vias
v3: diameter 0.45, hole 0.2, Top Layer to VEE, 11 vias
v4: diameter 0.45, hole 0.2, Top Layer to VCC, 10 vias
v5: diameter 0.45, hole 0.2, VCC to Bottom Layer, 5 vias
v6: diameter 0.45, hole 0.2, Top Layer to Bottom Layer, 4 vias
v7: diameter 0.45, hole 0.2, VEE to Bottom Layer, 4 vias
v8: diameter 1.27, hole 0.711, GND-A to Bottom Layer, 2 vias
v9: diameter 0.45, hole 0.2, GND-A to Bottom Layer, 1 vias

## Nets (pads, with @x,y where several pads share a name; then routed paths per layer and width w, separated by ;. In a path a pad name is that pad's centre, name@x,y a point inside that pad or via, vN(x,y) a via of type N, cw(c..) or ccw(c..) an arc to the next point about the centre after c; other vN are vias at no path point)
DIVin: BIN-CONT1.10 J1.1 OSCIL.2 R9.2 | length 36.8
  Bottom Layer w0.6: OSCIL.2 16.485,17.78 17.272,18.567 R9.2 21.742,18.567 27.432,24.257 30.262,24.257 32.385,22.134 J1.1 32.385,20.955 34.433,18.907 42.082,18.907 42.098,18.923 BIN-CONT1.10
DIVout: J1.2 J2.1 J3.1 J4.1 Q1.2 | length 19
  Bottom Layer w0.6: Q1.2 24.13,16.492 24.493,16.492 26.416,18.415 29.896,18.415 J1.2@29.896,21.59 ; J3.1 J4.1 J2.1
GND: "C5_U_2T 11.1" "C5_U_2T 12.1" "C5_U_2T 21.1" "C5_U_2T 22.1" "C5_U_2T 31.1" "C5_U_2T 32.1" "C5_U_2T 41.1" "C5_U_2T 42.1" "R2_U_2T 11.1" "R2_U_2T 12.1" "R2_U_2T 21.1" "R2_U_2T 22.1" "R2_U_2T 31.1" "R2_U_2T 32.1" "R2_U_2T 41.1" "R2_U_2T 42.1" "R7_U_2T 11.2" "R7_U_2T 12.2" "R7_U_2T 21.2" "R7_U_2T 22.2" "R7_U_2T 31.2" "R7_U_2T 32.2" "R7_U_2T 41.2" "R7_U_2T 42.2" C6.1 C8.1 C9.1 C10.1 C11.1 C12.1 C13.1 C14.1 C15.1 C16.1 C17.1 C18.1 C19.1 C20.1 C21.1 C22.1 C23.1 C24.1 C25.1 C26.1 C27.1 C28.1 C29.1 C30.1 C31.1 C32.1 C33.1 Ch.2 J5.2 J10.2 J11.2 OSCIL.9 OSCIL.11 OSCIL.13 R11.1 R12.1 R15.1 SH1.2 SH1.4 SH1.5 SH1.6 SH1.9 SH1.10 SH1.13 SH1.14 ULLA.3 ULLA.4 ULLA.5 ULLA.6 ULLA.8 ULLA.9 ULLA.10 ULLA.11 ULLA.12 | length 304.2
  Top Layer w0.6: v1(10.82,37.592) 12.903,37.592 13.157,37.338 13.183,37.313 13.183,34.163 ; v1(11.303,83.058) 13.767,83.058 C8.1 ; 13.03,50.8 12.217,50.8 9.677,48.26 9.677,44.45 v1(11.201,42.926) 13.818,42.926 C24.1@13.868,42.875 ; C18.1@23.597,85.014 23.774,84.836 24.028,85.09 v1(26.162,85.09) 26.162,85.065 27.788,83.439 27.788,79.629 25.248,77.089 24.435,77.089 ; C15.1 23.698,44.704 v1(26.162,44.704) ; 24.282,93.726 24.282,90.576 24.308,90.551 24.562,90.297 v1(26.645,90.297) ; v1(32.842,37.719) 34.925,37.719 35.179,37.465 35.204,37.44 35.204,34.29 ; v1(33.909,83.185) 33.985,83.261 C9.1 ; 35.052,50.927 34.239,50.927 31.699,48.387 31.699,44.577 v1(33.096,43.18) 33.223,43.053 35.839,43.053 C23.1@35.89,43.002 ; C14.1 45.771,44.704 v1(48.133,44.704) ; C17.1@46.076,85.014 46.126,84.963 v1(48.387,84.963) 48.743,84.963 50.267,83.439 50.267,79.629 47.727,77.089 46.914,77.089 ; 46.761,93.726 46.761,90.576 46.787,90.551 47.041,90.297 v1(49.124,90.297) ; v1(54.762,37.719) 56.845,37.719 57.099,37.465 57.125,37.44 57.125,34.29 ; v1(56.261,82.931) 58.598,82.931 C10.1 ; 56.972,50.927 56.159,50.927 53.619,48.387 53.619,44.577 v1(55.143,43.053) 57.76,43.053 C22.1@57.81,43.002 ; C13.1 67.589,44.831 v1(70.104,44.831) ; C19.1@68.504,84.887 68.555,84.836 68.682,84.963 v1(70.955,84.963) 71.044,84.963 72.695,83.312 72.695,79.502 70.155,76.962 69.342,76.962 ; 69.19,93.599 69.19,90.449 69.215,90.424 69.469,90.17 v1(71.552,90.17) ; v1(76.073,4.064) 79.985,4.064 R15.1 ; v1(76.987,38.227) 79.07,38.227 79.324,37.973 79.35,37.948 79.35,34.798 ; v1(78.613,83.185) 81.077,83.185 C11.1 ; 79.197,51.435 78.384,51.435 75.844,48.895 75.844,45.085 77.368,43.561 79.985,43.561 C21.1@80.035,43.51 ; R15.1@79.502,3.937 85.471,3.937 86.487,4.953 ULLA.4 ; C27.1 82.55,22.479 SH1.14 SH1.13 83.82,21.844 85.598,20.066 ; C26.1@82.55,13.716 83.433,13.716 85.217,11.932 ULLA.12 ULLA.11 ULLA.10 ULLA.9 ULLA.8 90.334,10.959 90.334,14.238 90.221,14.351 90.348,14.478 v1(93.218,14.478) ; SH1.2 83.82,18.933 84.953,20.066 85.598,20.066 ; ULLA.3 ULLA.4 ; ULLA.6 ULLA.5 ; C12.1 89.865,45.339 v1(92.329,45.339) ; C20.1@90.907,85.014 90.957,84.963 v1(93.345,84.963) 93.574,84.963 95.098,83.439 95.098,79.629 92.558,77.089 91.745,77.089 ; 91.592,93.726 91.592,90.576 91.618,90.551 91.872,90.297 v1(93.955,90.297) ; C33.1 93.04,5.537 91.313,3.81 89.078,3.81 87.757,5.131 ULLA.5 ; v1(95.758,21.336) 95.301,21.336 Ch.2 92.532,23.546 91.186,24.892 88.773,24.892 87.63,23.749 SH1.10 SH1.9 SH1.6 87.704,17.96 85.598,20.066 ; ULLA.4 ULLA.5
  Bottom Layer w0.6: C16.1@1.854,19.583 1.854,18.669 2.743,17.78 3.81,17.78 ; J10.2 3.632,74.676 v8(8.382,74.676) ; J5.2 6.437,61.555 v8(8.001,63.119) ; 4.445,17.551 4.039,17.551 3.81,17.78 ; v2(4.826,12.7) OSCIL.9 ; v2(4.826,15.316) 8.396,15.316 OSCIL.11 ; OSCIL.13 v2(4.699,17.78) 3.81,17.78 ; v2(8.636,31.242) 4.318,31.242 J11.2 4.318,33.02 v9(8.636,33.02) ; C25.1@16.256,8.636 16.307,8.585 v2(20.193,8.585) ; C6.1@21.463,25.349 v2(24.765,25.349) ; v2(34.671,25.781) 37.287,25.781 C29.1@37.541,25.527 ; v2(35.052,12.319) 36.551,12.319 C28.1@37.313,11.557 ; v2(35.179,5.842) R12.1 ; v2(35.179,20.32) R11.1 ; v2(41.021,15.113) 41.148,14.986 C30.1 ; C31.1@52.578,6.477 v2(52.578,9.271)
  other v1: 77.343,43.815
NetBIN-CONT1_11: BIN-CONT1.11 R11.2 | length 3.2
  Bottom Layer w0.6: R11.2@41.326,20.193 BIN-CONT1.11
NetBIN-CONT2_11: BIN-CONT2.11 R12.2 | length 3.7
  Bottom Layer w0.6: R12.2 41.199,5.781 44.347,5.781 BIN-CONT2.11
"NetC1_U_2T 11_1": "C1_U_2T 11.1" "R3_U_2T 11.1" "U1_U_2T 11.1" "U1_U_2T 11.2" | length 16.1
  Top Layer w0.6: 16.866,81.751 16.866,80.899 16.256,80.289 16.256,77.089 16.739,77.089 19.152,74.676 19.152,71.323 21.006,69.469 ; 16.891,81.003 18.161,81.003
"NetC1_U_2T 11_2": "C1_U_2T 11.2" "C4_U_2T 11.1" "R4_U_2T 11.1" | length 38.6
  Top Layer w0.6: 13.259,90.424 12.548,90.424 9.652,87.528 9.652,81.763 12.548,78.867 13.691,78.867 14.58,77.978 14.58,76.073 15.469,75.184 17.12,75.184 18.136,74.168 18.136,71.45 16.154,69.469 17.932,67.691 22.708,67.691 24.409,69.393 24.409,69.469
"NetC1_U_2T 12_1": "C1_U_2T 12.1" "R3_U_2T 12.1" "U1_U_2T 12.1" "U1_U_2T 12.2" | length 16.1
  Top Layer w0.6: 82.626,59.055 84.48,57.201 84.48,53.848 86.893,51.435 87.376,51.435 87.376,48.235 86.766,47.625 86.766,46.773 ; 85.471,47.521 86.741,47.521
"NetC1_U_2T 12_2": "C1_U_2T 12.2" "C4_U_2T 12.1" "R4_U_2T 12.1" | length 38.5
  Top Layer w0.6: 79.223,59.055 79.223,59.131 80.924,60.833 85.7,60.833 87.478,59.055 85.496,57.074 85.496,54.356 86.512,53.34 88.163,53.34 89.052,52.451 89.052,50.546 89.941,49.657 91.084,49.657 93.853,46.888 93.853,40.869 91.084,38.1 90.373,38.1
"NetC1_U_2T 21_1": "C1_U_2T 21.1" "R3_U_2T 21.1" "U1_U_2T 21.1" "U1_U_2T 21.2" | length 16.1
  Top Layer w0.6: 39.345,81.751 39.345,80.899 38.735,80.289 38.735,77.089 39.218,77.089 41.631,74.676 41.631,71.323 43.485,69.469 ; 39.37,81.003 40.64,81.003
"NetC1_U_2T 21_2": "C1_U_2T 21.2" "C4_U_2T 21.1" "R4_U_2T 21.1" | length 38.5
  Top Layer w0.6: 35.738,90.424 35.027,90.424 32.131,87.528 32.131,81.763 35.027,78.867 36.17,78.867 37.059,77.978 37.059,76.073 37.948,75.184 39.599,75.184 40.615,74.168 40.615,71.45 38.633,69.469 40.323,67.779 45.275,67.779 46.888,69.393 46.888,69.469
"NetC1_U_2T 22_1": "C1_U_2T 22.1" "R3_U_2T 22.1" "U1_U_2T 22.1" "U1_U_2T 22.2" | length 16.1
  Top Layer w0.6: 60.401,58.547 62.255,56.693 62.255,53.34 64.668,50.927 65.151,50.927 65.151,47.727 64.541,47.117 64.541,46.265 ; 63.246,47.013 64.516,47.013
"NetC1_U_2T 22_2": "C1_U_2T 22.2" "C4_U_2T 22.1" "R4_U_2T 22.1" | length 38.4
  Top Layer w0.6: 56.998,58.547 56.998,58.623 58.445,60.071 63.729,60.071 65.253,58.547 63.271,56.566 63.271,53.848 64.287,52.832 65.938,52.832 66.827,51.943 66.827,50.038 67.716,49.149 68.859,49.149 71.755,46.253 71.755,40.488 68.859,37.592 68.148,37.592
"NetC1_U_2T 31_1": "C1_U_2T 31.1" "R3_U_2T 31.1" "U1_U_2T 31.1" "U1_U_2T 31.2" | length 16.1
  Top Layer w0.6: 61.773,81.624 61.773,80.772 61.163,80.162 61.163,76.962 61.646,76.962 64.059,74.549 64.059,71.196 65.913,69.342 ; 61.798,80.876 63.068,80.876
"NetC1_U_2T 31_2": "C1_U_2T 31.2" "C4_U_2T 31.1" "R4_U_2T 31.1" | length 38.3
  Top Layer w0.6: 58.166,90.297 57.455,90.297 54.559,87.401 54.559,81.636 57.455,78.74 58.598,78.74 59.487,77.851 59.487,75.946 60.376,75.057 62.027,75.057 63.043,74.041 63.043,71.323 61.062,69.342 62.426,67.978 64.803,67.978 64.852,67.929 67.98,67.929 69.317,69.266 69.317,69.342
"NetC1_U_2T 32_1": "C1_U_2T 32.1" "R3_U_2T 32.1" "U1_U_2T 32.1" "U1_U_2T 32.2" | length 16.1
  Top Layer w0.6: 38.481,58.547 40.335,56.693 40.335,53.34 42.748,50.927 43.231,50.927 43.231,47.727 42.621,47.117 42.621,46.265 ; 41.326,47.013 42.596,47.013
"NetC1_U_2T 32_2": "C1_U_2T 32.2" "C4_U_2T 32.1" "R4_U_2T 32.1" | length 38.5
  Top Layer w0.6: 35.077,58.547 35.077,58.623 36.652,60.198 41.681,60.198 43.332,58.547 41.351,56.566 41.351,53.848 42.367,52.832 44.018,52.832 44.907,51.943 44.907,50.038 45.796,49.149 46.939,49.149 49.835,46.253 49.835,40.488 46.939,37.592 46.228,37.592
"NetC1_U_2T 41_1": "C1_U_2T 41.1" "R3_U_2T 41.1" "U1_U_2T 41.1" "U1_U_2T 41.2" | length 16.1
  Top Layer w0.6: 84.176,81.751 84.176,80.899 83.566,80.289 83.566,77.089 84.049,77.089 86.462,74.676 86.462,71.323 88.316,69.469 ; 84.201,81.003 85.471,81.003
"NetC1_U_2T 41_2": "C1_U_2T 41.2" "C4_U_2T 41.1" "R4_U_2T 41.1" | length 38.6
  Top Layer w0.6: 80.569,90.424 79.858,90.424 76.962,87.528 76.962,81.763 79.858,78.867 81.001,78.867 81.89,77.978 81.89,76.073 82.779,75.184 84.43,75.184 85.446,74.168 85.446,71.45 83.464,69.469 85.242,67.691 90.018,67.691 91.719,69.393 91.719,69.469
"NetC1_U_2T 42_1": "C1_U_2T 42.1" "R3_U_2T 42.1" "U1_U_2T 42.1" "U1_U_2T 42.2" | length 16.1
  Top Layer w0.6: 16.459,58.42 18.313,56.566 18.313,53.213 20.726,50.8 21.209,50.8 21.209,47.6 20.599,46.99 20.599,46.138 ; 19.304,46.886 20.574,46.886
"NetC1_U_2T 42_2": "C1_U_2T 42.2" "C4_U_2T 42.1" "R4_U_2T 42.1" | length 38.5
  Top Layer w0.6: 13.056,58.42 13.056,58.496 14.63,60.071 19.66,60.071 21.311,58.42 19.329,56.439 19.329,53.721 20.345,52.705 21.996,52.705 22.885,51.816 22.885,49.911 23.774,49.022 24.917,49.022 27.813,46.126 27.813,40.361 24.917,37.465 24.206,37.465
"NetC3_U_2T 11_1": "C3_U_2T 11.1" "R3_U_2T 11.2" "R5_U_2T 11.1" | length 24.1
  Top Layer w0.6: 12.827,73.279 12.827,77.064 12.852,77.089 8.636,81.305 8.636,89.154 13.208,93.726
"NetC3_U_2T 11_2": "C3_U_2T 11.2" "R1_U_2T 21.1" "R4_U_2T 11.2" "R8_U_2T 11.1" "U1_U_2T 11.7" | length 80.2
  Top Layer w0.6: 18.136,86.651 18.136,88.951 16.662,90.424 16.662,93.497 16.434,93.726 16.612,93.726 19.787,96.901 20.879,96.901 20.955,96.901 22.86,98.806 26.035,98.806 27.813,97.028 27.813,91.821 30.215,89.419 30.215,80.933 33.02,78.128 33.02,67.933 34.974,65.979 49.149,65.979 ; 46.914,73.279 47.879,73.279 50.673,70.485 50.673,67.564 49.149,66.04
"NetC3_U_2T 12_1": "C3_U_2T 12.1" "R3_U_2T 12.2" "R5_U_2T 12.1" | length 23.8
  Top Layer w0.6: 90.78,51.435 90.805,51.46 90.805,55.245 ; 90.932,34.798 95.101,38.967 95.101,47.622 91.288,51.435
"NetC3_U_2T 12_2": "C3_U_2T 12.2" "R1_U_2T 22.1" "R4_U_2T 12.2" "R8_U_2T 12.1" "U1_U_2T 12.7" | length 79.4
  Top Layer w0.6: 56.972,54.737 55.499,54.737 53.34,56.896 53.34,60.452 54.991,62.103 67.912,62.103 70.739,59.276 70.739,50.015 73.671,47.083 73.671,38.851 75.819,36.703 75.819,31.242 77.343,29.718 80.848,29.718 82.753,31.623 83.845,31.623 87.02,34.798 87.198,34.798 86.97,35.027 86.97,38.1 85.496,39.573 85.496,41.873
"NetC3_U_2T 21_1": "C3_U_2T 21.1" "R3_U_2T 21.2" "R5_U_2T 21.1" | length 24.1
  Top Layer w0.6: 35.306,73.279 35.306,77.064 35.331,77.089 31.115,81.305 31.115,89.154 35.687,93.726
"NetC3_U_2T 21_2": "C3_U_2T 21.2" "R1_U_2T 31.1" "R4_U_2T 21.2" "R8_U_2T 21.1" "U1_U_2T 21.7" | length 80.2
  Top Layer w0.6: 40.615,86.651 40.615,88.951 39.141,90.424 39.141,93.497 38.913,93.726 39.091,93.726 42.266,96.901 43.358,96.901 45.263,98.806 49.022,98.806 50.292,97.536 50.292,91.948 52.643,89.597 52.643,80.806 55.499,77.95 55.499,68.283 57.653,66.129 71.717,66.129 73.406,67.818 73.406,69.977 70.231,73.152 69.342,73.152
"NetC3_U_2T 22_1": "C3_U_2T 22.1" "R3_U_2T 22.2" "R5_U_2T 22.1" | length 24.1
  Top Layer w0.6: 68.199,34.29 72.771,38.862 72.771,46.711 68.555,50.927 68.58,50.952 68.58,54.737
"NetC3_U_2T 22_2": "C3_U_2T 22.2" "R1_U_2T 32.1" "R4_U_2T 22.2" "R8_U_2T 22.1" "U1_U_2T 22.7" | length 79.7
  Top Layer w0.6: 35.052,54.737 33.528,54.737 31.623,56.642 31.623,60.125 33.496,61.998 46.46,61.998 48.895,59.563 48.895,49.939 51.751,47.083 51.751,38.419 53.34,36.83 53.34,30.353 54.356,29.337 58.75,29.337 60.528,31.115 61.62,31.115 64.795,34.29 64.973,34.29 64.745,34.519 64.745,37.592 63.271,39.065 63.271,41.365
"NetC3_U_2T 31_1": "C3_U_2T 31.1" "R3_U_2T 31.2" "R5_U_2T 31.1" | length 24.1
  Top Layer w0.6: 57.734,73.152 57.734,76.937 57.76,76.962 53.543,81.178 53.543,89.027 58.115,93.599
"NetC3_U_2T 31_2": "C3_U_2T 31.2" "R1_U_2T 41.1" "R4_U_2T 31.2" "R8_U_2T 31.1" "U1_U_2T 31.7" | length 79.9
  Top Layer w0.6: 63.043,86.524 63.043,88.824 61.57,90.297 61.57,93.37 61.341,93.599 61.519,93.599 64.694,96.774 65.786,96.774 67.691,98.679 71.247,98.679 72.644,97.282 72.644,91.821 75.046,89.419 75.046,80.933 77.978,78.001 77.978,68.326 80.413,65.891 93.831,65.891 95.377,67.437 95.377,70.612 92.71,73.279 91.745,73.279
"NetC3_U_2T 32_1": "C3_U_2T 32.1" "R3_U_2T 32.2" "R5_U_2T 32.1" | length 24.1
  Top Layer w0.6: 46.279,34.29 50.851,38.862 50.851,46.711 46.634,50.927 46.66,50.952 46.66,54.737
"NetC3_U_2T 32_2": "C3_U_2T 32.2" "R1_U_2T 42.1" "R4_U_2T 32.2" "R8_U_2T 32.1" "U1_U_2T 32.7" | length 80.1
  Top Layer w0.6: 13.03,54.61 11.938,54.61 9.793,56.755 9.793,60.19 11.707,62.103 25.019,62.103 26.797,60.325 26.797,49.888 29.729,46.956 29.729,37.454 31.369,35.814 31.369,30.353 32.512,29.21 36.957,29.21 38.608,30.861 38.608,31.115 39.7,31.115 42.875,34.29 43.053,34.29 42.824,34.519 42.824,37.592 41.351,39.065 41.351,41.365
"NetC3_U_2T 41_1": "C3_U_2T 41.1" "R3_U_2T 41.2" "R5_U_2T 41.1" | length 24.1
  Top Layer w0.6: 80.137,73.279 80.137,77.064 80.162,77.089 75.946,81.305 75.946,89.154 80.518,93.726
"NetC3_U_2T 41_2": "C3_U_2T 41.2" "R4_U_2T 41.2" "R8_U_2T 41.1" "U1_U_2T 41.7" J6.1 | length 123.3
  Top Layer w0.6: J6.1 70.485,22.86 74.284,26.659 87.489,26.659 87.522,26.692 93.497,26.692 98.817,32.012 98.817,93.715 93.98,98.552 89.84,98.552 88.189,96.901 87.097,96.901 83.922,93.726 83.744,93.726 83.972,93.497 83.972,90.424 85.446,88.951 85.446,86.651
"NetC3_U_2T 42_1": "C3_U_2T 42.1" "R3_U_2T 42.2" "R5_U_2T 42.1" | length 24.1
  Top Layer w0.6: 24.257,34.163 28.829,38.735 28.829,46.584 24.613,50.8 24.638,50.825 24.638,54.61
"NetC3_U_2T 42_2": "C3_U_2T 42.2" "R4_U_2T 42.2" "R8_U_2T 42.1" "U1_U_2T 42.7" J9.1 | length 80
  Top Layer w0.6: 19.329,41.238 19.329,38.938 20.803,37.465 20.803,34.392 21.031,34.163 20.853,34.163 17.107,30.416 19.213,28.31 37.33,28.31 37.341,28.321 53.848,28.321 60.452,21.717 60.452,12.332 J9.1
"NetC4_U_2T 11_2": "C4_U_2T 11.2" "C5_U_2T 11.2" "R5_U_2T 11.2" "U1_U_2T 11.5" | length 57.8
  Top Layer w0.6: 16.231,73.279 16.231,72.949 12.751,69.469 15.545,66.675 25.375,66.675 26.772,68.072 26.772,70.104 25.629,71.247 23.851,71.247 22.708,72.39 22.708,74.422 23.66,75.374 26.073,75.374 28.804,78.105 28.804,84.709 26.391,87.122 21.565,87.122 20.885,86.442 20.676,86.651 20.676,90.322 20.904,90.551
"NetC4_U_2T 12_2": "C4_U_2T 12.2" "C5_U_2T 12.2" "R5_U_2T 12.2" "U1_U_2T 12.5" | length 57.9
  Top Layer w0.6: 82.728,37.973 82.956,38.202 82.956,41.873 82.747,42.082 82.067,41.402 77.241,41.402 74.828,43.815 74.828,50.419 77.559,53.149 79.972,53.149 80.924,54.102 80.924,56.134 79.781,57.277 78.003,57.277 76.86,58.42 76.86,60.452 78.395,61.987 87.949,61.987 90.881,59.055 87.401,55.575 87.401,55.245
"NetC4_U_2T 21_2": "C4_U_2T 21.2" "C5_U_2T 21.2" "R5_U_2T 21.2" "U1_U_2T 21.5" | length 57.6
  Top Layer w0.6: 38.71,73.279 38.71,72.949 35.23,69.469 37.82,66.879 48.058,66.879 49.251,68.072 49.251,70.104 48.108,71.247 46.33,71.247 45.187,72.39 45.187,74.422 46.139,75.374 48.552,75.374 51.283,78.105 51.283,84.709 48.87,87.122 44.044,87.122 43.364,86.442 43.155,86.651 43.155,90.322 43.383,90.551
"NetC4_U_2T 22_2": "C4_U_2T 22.2" "C5_U_2T 22.2" "R5_U_2T 22.2" "U1_U_2T 22.5" | length 57.5
  Top Layer w0.6: 60.503,37.465 60.731,37.694 60.731,41.365 60.522,41.574 59.842,40.894 55.016,40.894 52.705,43.205 52.705,50.013 55.334,52.642 57.747,52.642 58.699,53.594 58.699,55.626 57.556,56.769 55.778,56.769 54.635,57.912 54.635,59.944 55.778,61.087 66.116,61.087 68.656,58.547 65.176,55.067 65.176,54.737
"NetC4_U_2T 31_2": "C4_U_2T 31.2" "C5_U_2T 31.2" "R5_U_2T 31.2" "U1_U_2T 31.5" | length 57.4
  Top Layer w0.6: 61.138,73.152 61.138,72.822 57.658,69.342 59.971,67.029 70.763,67.029 71.679,67.945 71.679,69.977 70.536,71.12 68.758,71.12 67.615,72.263 67.615,74.295 68.567,75.248 70.98,75.248 73.711,77.978 73.711,84.582 71.298,86.995 66.472,86.995 65.792,86.315 65.583,86.524 65.583,90.195 65.811,90.424
"NetC4_U_2T 32_2": "C4_U_2T 32.2" "C5_U_2T 32.2" "R5_U_2T 32.2" "U1_U_2T 32.5" | length 57.6
  Top Layer w0.6: 38.583,37.465 38.811,37.694 38.811,41.365 38.602,41.574 37.922,40.894 33.096,40.894 30.683,43.307 30.683,49.911 33.414,52.642 35.827,52.642 36.779,53.594 36.779,55.626 35.636,56.769 33.858,56.769 32.715,57.912 32.715,59.944 33.869,61.098 44.185,61.098 46.736,58.547 43.256,55.067 43.256,54.737
"NetC4_U_2T 41_2": "C4_U_2T 41.2" "C5_U_2T 41.2" "R5_U_2T 41.2" "U1_U_2T 41.5" | length 57.7
  Top Layer w0.6: 83.541,73.279 83.541,72.949 80.061,69.469 82.739,66.791 92.801,66.791 94.082,68.072 94.082,70.104 92.939,71.247 91.161,71.247 90.018,72.39 90.018,74.422 90.97,75.374 93.383,75.374 96.114,78.105 96.114,84.709 93.701,87.122 88.875,87.122 88.195,86.442 87.986,86.651 87.986,90.322 88.214,90.551
"NetC4_U_2T 42_2": "C4_U_2T 42.2" "C5_U_2T 42.2" "R5_U_2T 42.2" "U1_U_2T 42.5" | length 57.7
  Top Layer w0.6: 16.561,37.338 16.789,37.567 16.789,41.238 16.58,41.447 15.9,40.767 11.074,40.767 8.661,43.18 8.661,49.784 11.392,52.514 13.805,52.514 14.757,53.467 14.757,55.499 13.614,56.642 11.836,56.642 10.693,57.785 10.693,59.817 11.974,61.098 22.036,61.098 24.714,58.42 21.234,54.94 21.234,54.61
NetC6_2: C6.2 OSCIL.1 R9.1 | length 9.2
  Bottom Layer w0.6: OSCIL.1 14.986,19.05 R9.1 21.311,21.971 C6.2
NetC7_2: C7.2 OSCIL.3 Q1.1 R10.1 | length 18.4
  Bottom Layer w0.6: OSCIL.3 13.433,16.571 21.438,16.571 23.8,14.209 23.841,14.209 ; R10.1 23.114,13.482 23.841,14.209 ; C7.2 26.289,13.183 Q1.1 23.841,14.209
NetCh_1: Ch.1 SH1.8 | length 4
  Top Layer w0.6: SH1.8 92.888,20.142 Ch.1
NetJ6_2: J6.2 J7.3 SH1.1 | length 19.3
  Top Layer w0.6: J6.2@69.285,20.574 J6.2 69.285,17.71 70.288,16.707 J7.3 72.845,15.113 75.692,17.96 SH1.1
NetJ7_1: J7.1 SH1.7 | length 30.8
  Top Layer w0.6: J7.1 67.888,13.689 69.004,12.573 72.771,12.573 76.308,16.11 82.315,16.11 85.598,12.827 87.564,12.827 88.519,13.782 88.519,15.327 89.21,16.018 89.682,16.49 89.821,16.49 89.968,16.637 90.17,16.637 SH1.7
NetJ7_2: J7.2 J8.3 R15.2 ULLA.2 | length 34.5
  Top Layer w0.6: J8.3 66.561,11.43 ; J7.2 69.088,16.383 67.945,17.526 66.294,17.526 65.024,16.256 65.024,12.967 66.561,11.43 ; R15.2@79.756,8.128 82.851,8.128 83.947,7.032 ULLA.2 ; R15.2 78.232,7.493 74.295,11.43 66.561,11.43
NetJ8_1: J8.1 ULLA.1 | length 14.4
  Top Layer w0.6: J8.1 73.787,10.033 77.761,6.059 ULLA.1 ULLA.1@82.677,6.477
NetJ8_2: "R1_U_2T 12.1" J8.2 J9.3 | length 190.5
  Top Layer w0.6: J8.2 69.158,8.058 70.231,6.985 J9.3 70.231,4.304 68.986,3.059 67.172,3.059 59.309,10.922 59.309,20.955 52.843,27.421 37.714,27.421 37.703,27.41 13.357,27.41 10.668,30.099 10.668,35.56 9.92,36.308 9.92,40.245 7.239,42.926 7.239,51.943 8.893,53.597 8.893,60.563 11.334,63.003 25.392,63.003 25.432,63.043 62.602,63.043 62.642,63.003 68.285,63.003 68.307,62.981 70.115,62.981 77.851,55.245 79.197,55.245
NetOSCIL_4: OSCIL.4 OSCIL.5 SH1.11 | length 131.3
  Top Layer w0.6: v6(16.256,15.113) 16.256,5.715 20.828,1.143 93.853,1.143 98.298,5.588 98.298,21.463 93.969,25.792 87.895,25.792 86.36,24.257 SH1.11
  Bottom Layer w0.6: OSCIL.5@13.448,13.919 13.321,14.046 13.245,13.97 13.246,13.983 OSCIL.4 13.499,15.113 v6(16.256,15.113)
NetOSCIL_6: OSCIL.6 ULLA.13 | length 112.7
  Top Layer w0.6: v6(17.907,12.649) 17.907,5.588 21.336,2.159 93.218,2.159 96.901,5.842 96.901,9.271 95.25,10.922 92.583,10.922 90.424,8.763 85.17,8.763 83.947,9.986 ULLA.13
  Bottom Layer w0.6: OSCIL.6 17.653,12.7
"NetR1_U_2T 11_2": "R1_U_2T 11.2" "R2_U_2T 11.2" "U1_U_2T 11.3" | length 9.1
  Top Layer w0.6: 19.406,81.751 19.406,78.715 21.031,77.089 21.031,73.279
"NetR1_U_2T 12_2": "R1_U_2T 12.2" "R2_U_2T 12.2" "U1_U_2T 12.3" | length 9.1
  Top Layer w0.6: 82.601,55.245 82.601,51.435 84.226,49.809 84.226,46.773
"NetR1_U_2T 21_2": "R1_U_2T 21.2" "R2_U_2T 21.2" "U1_U_2T 21.3" | length 9.1
  Top Layer w0.6: 41.885,81.751 41.885,78.715 43.51,77.089 43.51,73.279
"NetR1_U_2T 22_2": "R1_U_2T 22.2" "R2_U_2T 22.2" "U1_U_2T 22.3" | length 9.1
  Top Layer w0.6: 60.376,54.737 60.376,50.927 62.001,49.301 62.001,46.265
"NetR1_U_2T 31_2": "R1_U_2T 31.2" "R2_U_2T 31.2" "U1_U_2T 31.3" | length 9.1
  Top Layer w0.6: 64.313,81.624 64.313,78.588 65.938,76.962 65.938,73.152
"NetR1_U_2T 32_2": "R1_U_2T 32.2" "R2_U_2T 32.2" "U1_U_2T 32.3" | length 9.1
  Top Layer w0.6: 38.456,54.737 38.456,50.927 40.081,49.301 40.081,46.265
"NetR1_U_2T 41_2": "R1_U_2T 41.2" "R2_U_2T 41.2" "U1_U_2T 41.3" | length 9.1
  Top Layer w0.6: 86.716,81.751 86.716,78.715 88.341,77.089 88.341,73.279
"NetR1_U_2T 42_2": "R1_U_2T 42.2" "R2_U_2T 42.2" "U1_U_2T 42.3" | length 9.1
  Top Layer w0.6: 16.434,54.61 16.434,50.8 18.059,49.174 18.059,46.138
"NetR7_U_2T 11_1": "R7_U_2T 11.1" "R8_U_2T 11.2" "U1_U_2T 11.6" | length 12.4
  Top Layer w0.6: 19.406,86.651 19.406,92.253 20.879,93.726 21.107,93.726 24.282,96.901
"NetR7_U_2T 12_1": "R7_U_2T 12.1" "R8_U_2T 12.2" "U1_U_2T 12.6" | length 12.4
  Top Layer w0.6: 79.35,31.623 82.525,34.798 82.753,34.798 84.226,36.271 84.226,41.873
"NetR7_U_2T 21_1": "R7_U_2T 21.1" "R8_U_2T 21.2" "U1_U_2T 21.6" | length 12.4
  Top Layer w0.6: 41.885,86.651 41.885,92.253 43.358,93.726 43.586,93.726 46.761,96.901
"NetR7_U_2T 22_1": "R7_U_2T 22.1" "R8_U_2T 22.2" "U1_U_2T 22.6" | length 12.4
  Top Layer w0.6: 57.125,31.115 60.3,34.29 60.528,34.29 62.001,35.763 62.001,41.365
"NetR7_U_2T 31_1": "R7_U_2T 31.1" "R8_U_2T 31.2" "U1_U_2T 31.6" | length 12.4
  Top Layer w0.6: 64.313,86.524 64.313,92.126 65.786,93.599 66.015,93.599 69.19,96.774
"NetR7_U_2T 32_1": "R7_U_2T 32.1" "R8_U_2T 32.2" "U1_U_2T 32.6" | length 12.4
  Top Layer w0.6: 35.204,31.115 38.379,34.29 38.608,34.29 40.081,35.763 40.081,41.365
"NetR7_U_2T 41_1": "R7_U_2T 41.1" "R8_U_2T 41.2" "U1_U_2T 41.6" | length 12.4
  Top Layer w0.6: 86.716,86.651 86.716,92.253 88.189,93.726 88.417,93.726 91.592,96.901
"NetR7_U_2T 42_1": "R7_U_2T 42.1" "R8_U_2T 42.2" "U1_U_2T 42.6" | length 12.4
  Top Layer w0.6: 13.183,30.988 16.358,34.163 16.586,34.163 18.059,35.636 18.059,41.238
Q7: BIN-CONT1.4 J2.2 | length 30
  Bottom Layer w0.6: J2.2@32.258,18.669 32.258,18.542 37.465,13.335 49.53,13.335 51.816,15.621 51.816,21.33 50.734,22.413
Q8: BIN-CONT1.13 BIN-CONT2.10 | length 57.3
  Bottom Layer w0.6: BIN-CONT1.13 45.513,22.733 46.736,23.956 46.736,26.797 47.879,27.94 51.562,27.94 53.086,26.416 53.086,12.827 56.769,9.144 56.769,4.191 53.848,1.27 42.672,1.27 42.037,1.905 42.037,3.175 43.053,4.191 BIN-CONT2.10
Q10: BIN-CONT1.14 J3.2 | length 79.9
  Bottom Layer w0.6: J3.2 32.385,8.509 27.559,3.683 13.843,3.683 10.668,6.858 10.668,20.828 16.891,27.051 31.242,27.051 36.068,22.225 41.402,22.225 43.18,24.003 BIN-CONT1.14 ; BIN-CONT1.14@44.323,23.749 BIN-CONT1.14@44.704,24.13
Q16: BIN-CONT2.13 J4.2 | length 15.9
  Bottom Layer w0.6: J4.2@32.512,14.351 32.512,12.446 36.957,8.001 BIN-CONT2.13
VCC: "U1_U_2T 11.8" "U1_U_2T 12.8" "U1_U_2T 21.8" "U1_U_2T 22.8" "U1_U_2T 31.8" "U1_U_2T 32.8" "U1_U_2T 41.8" "U1_U_2T 42.8" BIN-CONT1.16 BIN-CONT2.16 C8.2 C9.2 C10.2 C11.2 C12.2 C13.2 C14.2 C15.2 C16.2 C26.2 C27.2 C28.2 C29.2 J11.1 OSCIL.14 R10.2 SH1.12 ULLA.14 | length 86
  Top Layer w0.6: v4(11.303,86.741) 13.894,86.741 C8.2 16.852,86.665 16.866,86.651 ; 20.599,41.238 20.613,41.224 C15.2 23.698,41.148 v4(26.162,41.148) ; v4(33.909,86.614) 36.398,86.614 C9.2 39.331,86.665 39.345,86.651 ; 42.621,41.365 42.635,41.351 C14.2 45.923,41.148 v4(48.133,41.148) ; v4(56.261,86.614) 56.337,86.538 C10.2 61.759,86.538 61.773,86.524 ; 64.555,41.351 64.541,41.365 64.578,41.402 C13.2 67.691,41.275 v4(69.977,41.275) ; v4(76.327,11.684) 76.403,11.684 C26.2 ; v4(76.962,23.241) 79.858,23.241 C27.2 79.883,23.241 81.407,24.765 84.158,24.765 85.09,23.833 SH1.12 ; v4(78.613,86.741) 81.077,86.741 C11.2 ; C26.2@79.197,14.224 79.197,13.513 81.751,10.959 ULLA.14 ; 84.162,86.665 84.176,86.651 ; 86.766,41.873 86.78,41.859 C12.2 89.992,41.656 v4(92.329,41.656)
  Bottom Layer w0.6: J11.1 3.476,27.178 v5(8.636,27.178) ; v5(8.255,20.955) 6.985,20.955 6.071,20.041 7.061,19.05 OSCIL.14 ; v5(23.114,5.41) R10.2 ; v5(40.767,9.398) 40.716,9.449 40.716,11.557 40.97,11.811 BIN-CONT2.16 ; v5(40.945,23.749) 40.945,25.527 41.961,26.543 BIN-CONT1.16
VEE: "U1_U_2T 11.4" "U1_U_2T 12.4" "U1_U_2T 21.4" "U1_U_2T 22.4" "U1_U_2T 31.4" "U1_U_2T 32.4" "U1_U_2T 41.4" "U1_U_2T 42.4" BIN-CONT1.8 BIN-CONT2.8 C7.1 C17.2 C18.2 C19.2 C20.2 C21.2 C22.2 C23.2 C24.2 C25.2 C30.2 C31.2 C32.2 C33.2 J11.3 OSCIL.7 Q1.3 SH1.3 ULLA.7 | length 92.2
  Top Layer w0.6: v3(11.303,46.101) 13.665,46.101 C24.2 16.776,46.152 16.789,46.138 ; 20.676,81.751 23.382,81.751 C18.2 25.984,81.864 v3(26.035,81.915) ; v3(33.274,46.228) 35.636,46.228 C23.2 38.797,46.279 38.811,46.265 ; 43.155,81.751 45.96,81.751 C17.2 48.438,81.737 v3(48.514,81.661) ; v3(55.118,46.101) 57.607,46.101 C22.2 60.618,46.152 60.731,46.265 ; 65.583,81.624 68.439,81.624 C19.2 68.656,81.407 69.037,81.788 69.291,81.534 v3(70.993,81.534) ; v3(77.47,46.736) 79.959,46.736 C21.2 82.943,46.787 82.956,46.773 ; v3(84.9,15.303) 85.09,15.494 SH1.3@85.09,16.764 ; SH1.3 SH1.3@85.09,16.764 ; C32.2@86.817,14.351 86.817,15.037 SH1.3@85.09,16.764 ; 87.986,81.751 90.918,81.751 C20.2 93.269,81.737 v3(93.345,81.661) ; ULLA.7 90.336,6.059 C33.2 94.056,8.941 v3(95.504,7.493)
  Bottom Layer w0.6: J11.3 3.476,37.084 v7(8.636,37.084) ; C25.2 13.284,6.909 v3(14.097,6.096) ; C25.2@13.335,8.458 13.372,8.495 OSCIL.7 ; v7(26.289,5.283) C7.1 28.194,10.566 28.194,15.24 27.214,16.22 Q1.3 ; C30.2 48.895,14.986 v7(49.403,15.494) 49.44,15.531 BIN-CONT1.8 ; BIN-CONT2.8 53.01,2.921 55.042,4.953 v7(55.245,4.953)
VIN: "R1_U_2T 11.1" J6.3 J10.1 | length 171.2
  Top Layer w0.6: v6(8.509,69.756) 12.49,65.775 26.289,65.775 29.538,69.025 29.654,69.025 ; 24.435,73.279 25.4,73.279 29.654,69.025 ; J6.3 68.085,24.143 71.628,27.686 93.218,27.686 97.917,32.385 97.917,57.039 90.175,64.781 69.052,64.781 69.03,64.803 63.387,64.803 63.347,64.843 33.836,64.843 29.654,69.025
  Bottom Layer w0.6: J10.1 v6(8.509,69.756)
VOUT: J5.1 J9.2 | length 185
  Top Layer w0.6: v6(7.493,56.515) 7.493,60.452 10.984,63.943 13.716,63.943 62.974,63.943 63.014,63.903 68.658,63.903 68.68,63.881 89.802,63.881 96.901,56.782 96.901,32.766 92.837,28.702 69.215,28.702 61.722,21.209 61.722,13.335 69.031,6.026 J9.2
  Bottom Layer w0.6: J5.1 7.453,56.555 v6(7.493,56.515)
pads on no net: BIN-CONT1.1 BIN-CONT1.2 BIN-CONT1.3 BIN-CONT1.5 BIN-CONT1.6 BIN-CONT1.7 BIN-CONT1.9 BIN-CONT1.12 BIN-CONT1.15 BIN-CONT2.1 BIN-CONT2.2 BIN-CONT2.3 BIN-CONT2.4 BIN-CONT2.5 BIN-CONT2.6 BIN-CONT2.7 BIN-CONT2.9 BIN-CONT2.12 BIN-CONT2.14 BIN-CONT2.15 OSCIL.8 OSCIL.10 OSCIL.12 Q1.4

## Polygon pours and split planes (outlines as drawn)
GND on Top Layer "Top Layer-GND" (solid, pour order 2): 0,0 0,100 100,100 100,0
GND on Bottom Layer "Bottom Layer-GND" (solid, pour order 4): 0,0 0,100 100,100 100,0
GND on GND-A (split plane): 99.49,0.51 0.51,0.51 0.51,99.49 99.49,99.49
VCC on VCC (split plane): 99.49,0.51 0.51,0.51 0.51,99.49 99.49,99.49
GND on GND-D (split plane): 99.49,0.51 0.51,0.51 0.51,99.49 99.49,99.49
VEE on VEE (split plane): 99.49,0.51 0.51,0.51 0.51,99.49 99.49,99.49

## Other copper
GND-A (plane layer: these items are gaps in the copper):
  region: 6.223,53.975
  region: -7.747,83.439

## Silkscreen, mask and mechanical layers (free items; w line width, h text height)
Top Overlay:
  text "ITBA - ASSD" at 29.845,18.161 h1.52
  text "TP1: MUESTREO" at 26.416,14.732 h1.52
  text "GRUPO1 - 2020" at 27.813,11.303 h1.52
Drill Drawing:
  lines w0.254: 100,100 0,100 ; 0,100 0,0 0,100